# EAGLE board SparkFun_Artemis_OpenLog-Panel (EAGLE 9.6.0), part 1 of 8
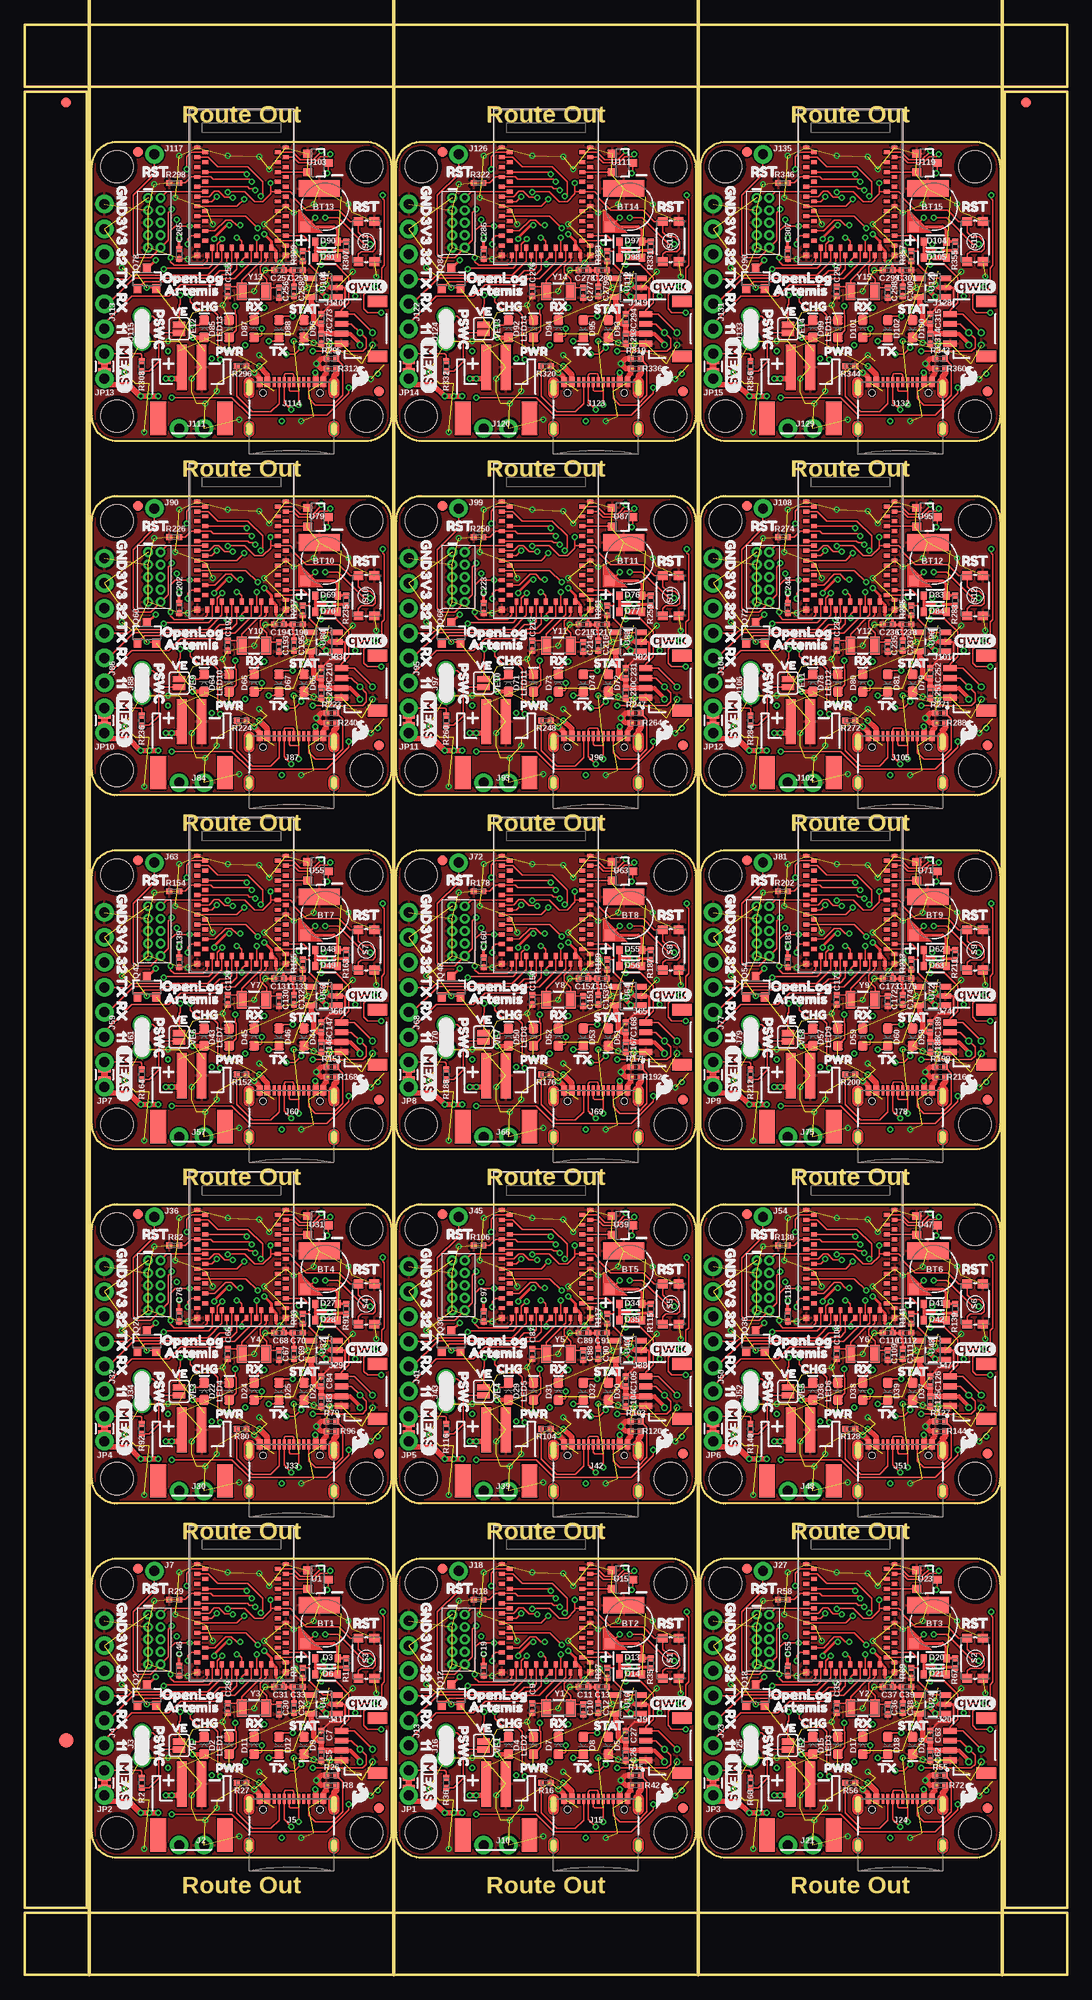
[diagram p0: board, top side]
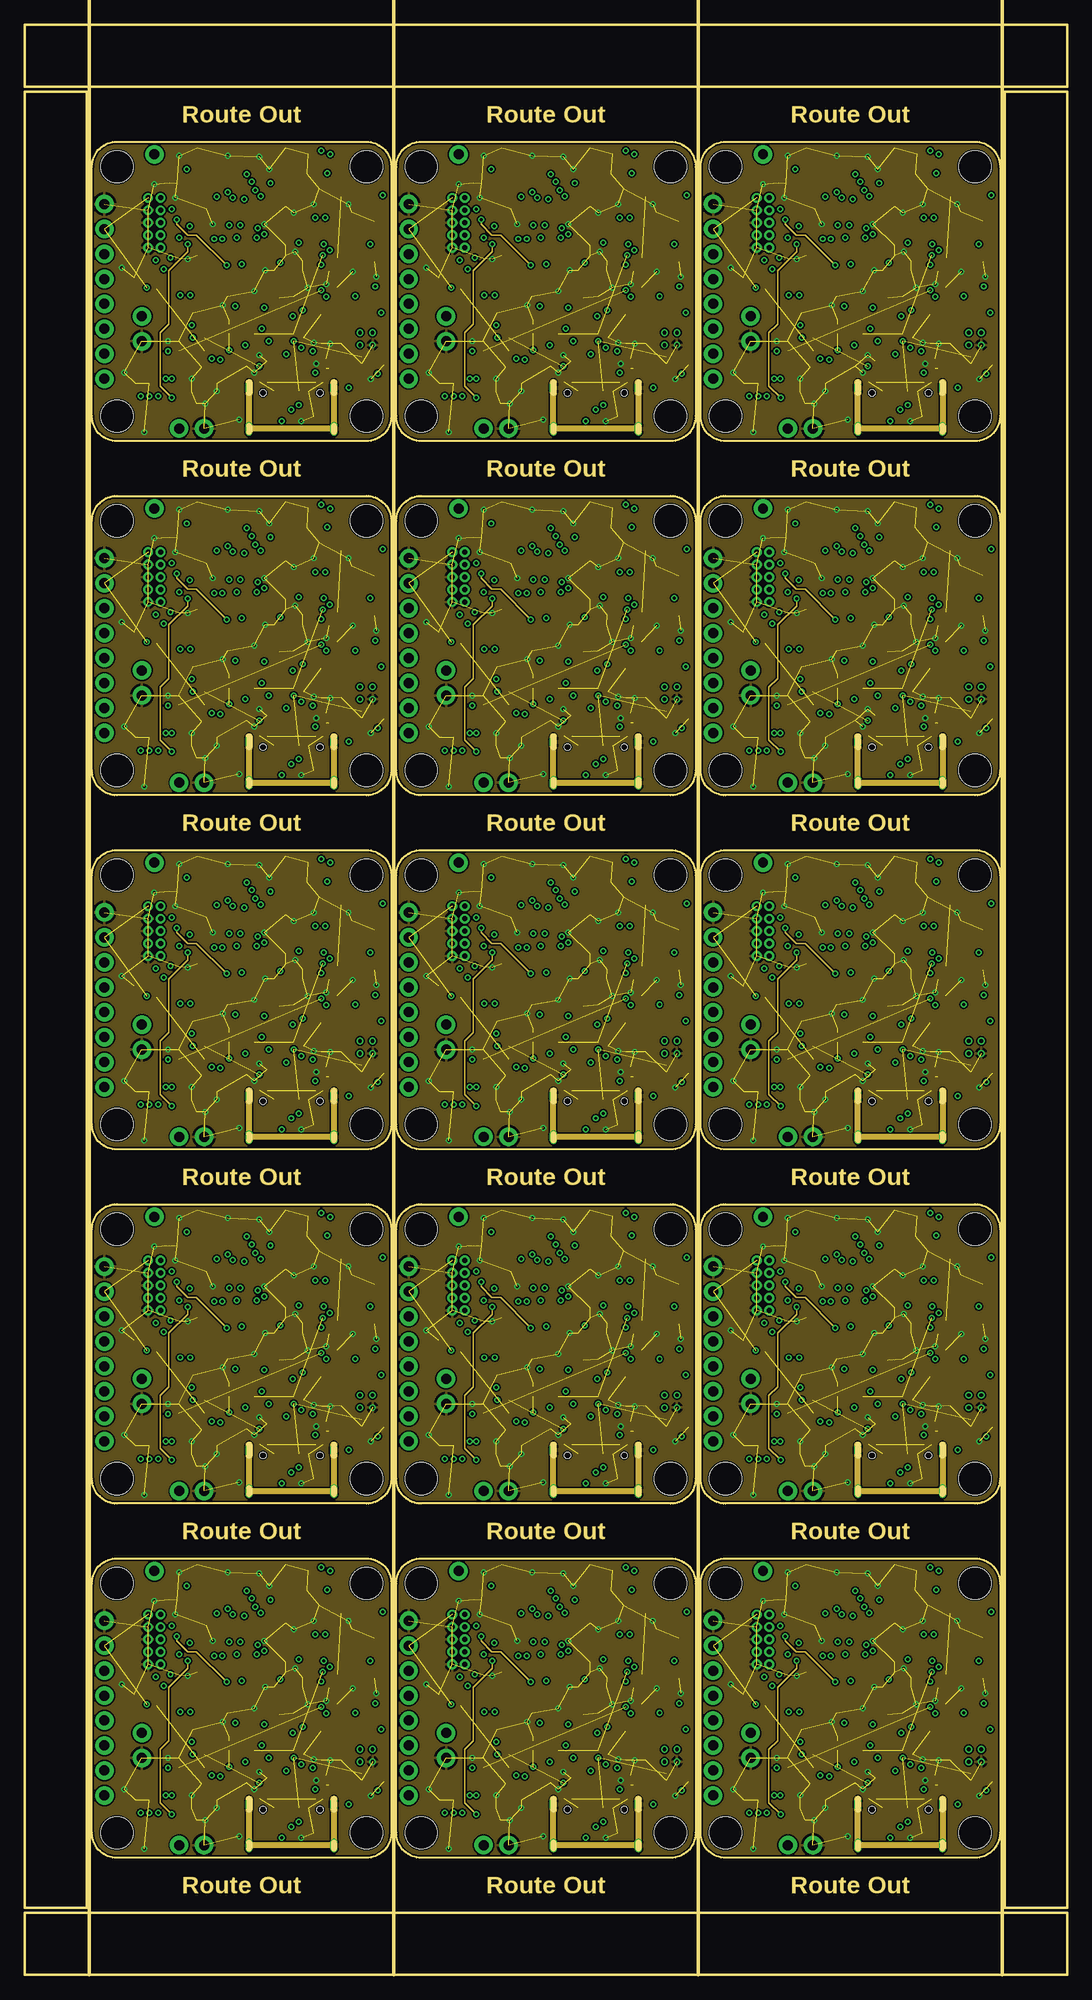
[diagram p1: board, inner layer Route2]
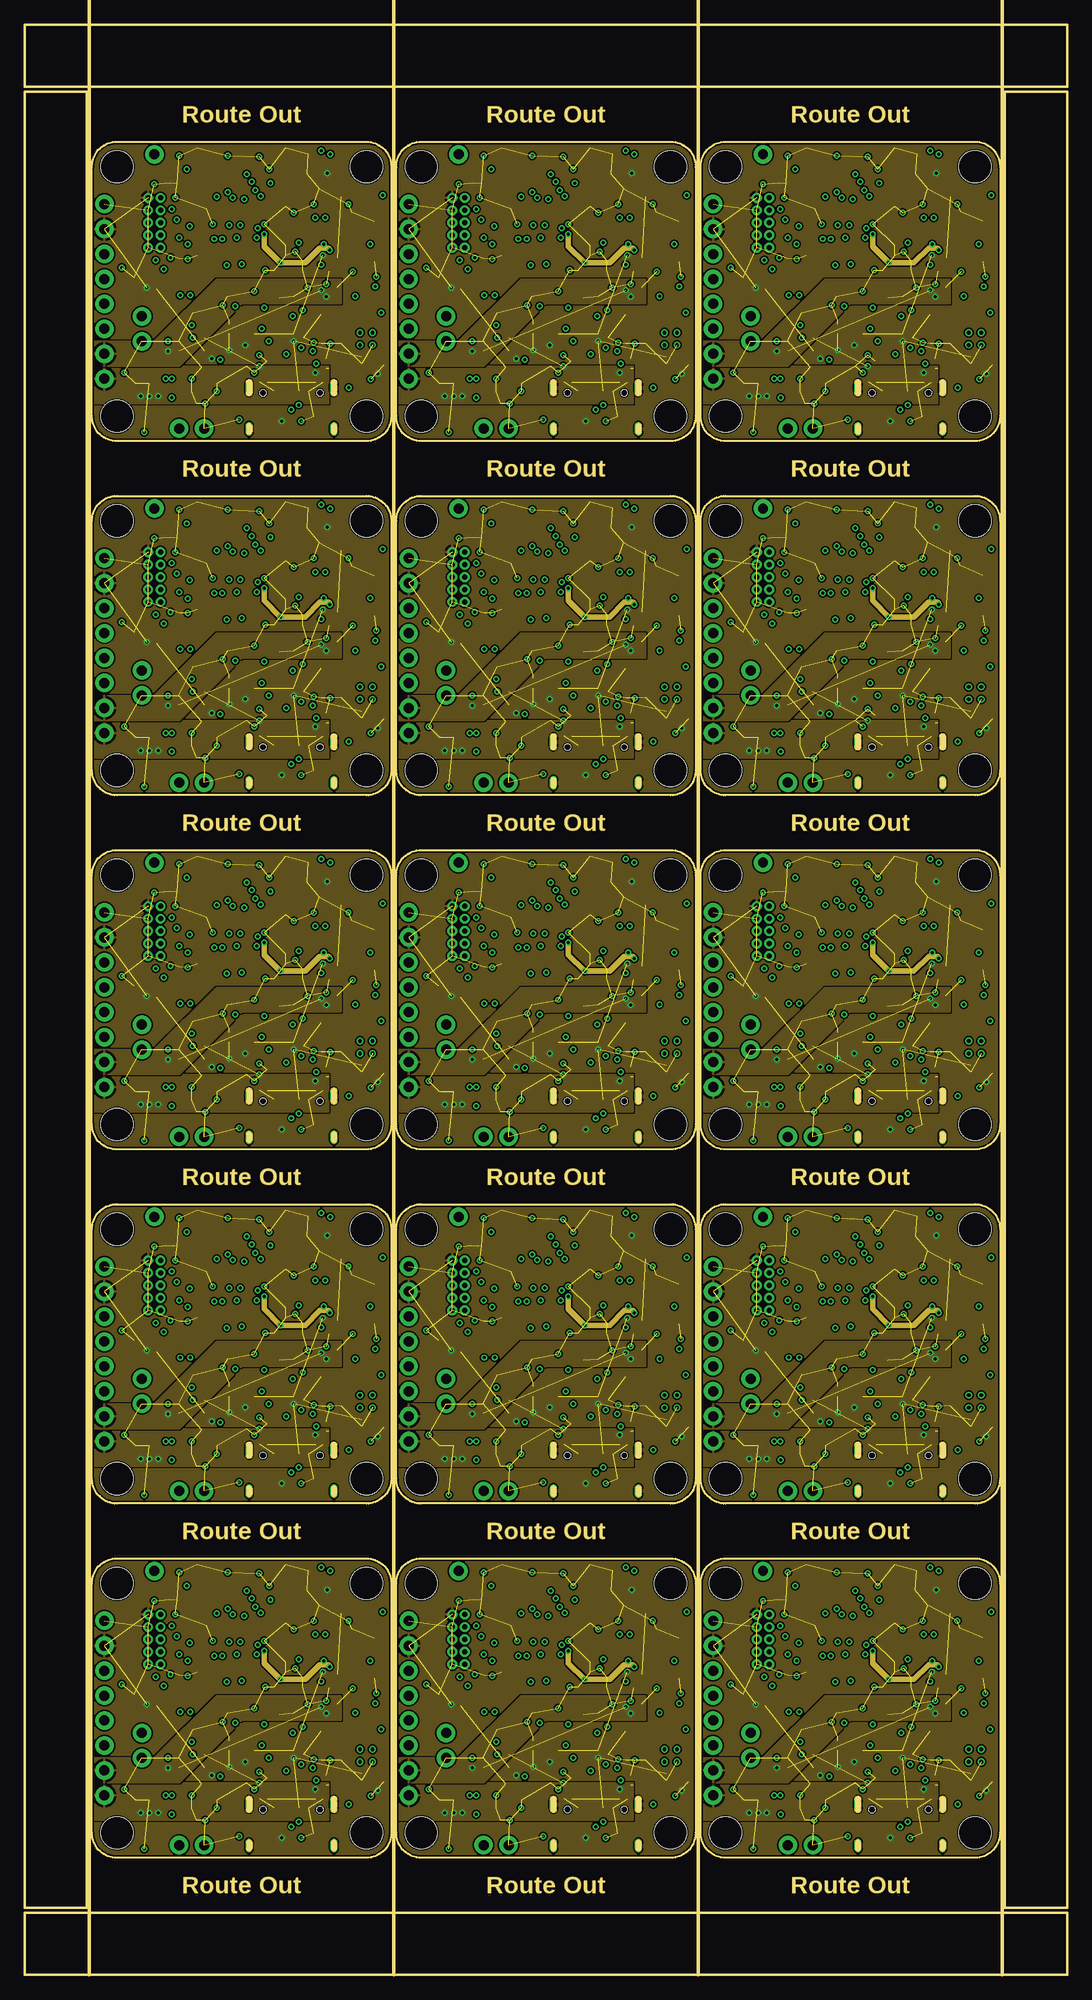
[diagram p2: board, inner layer Route15]
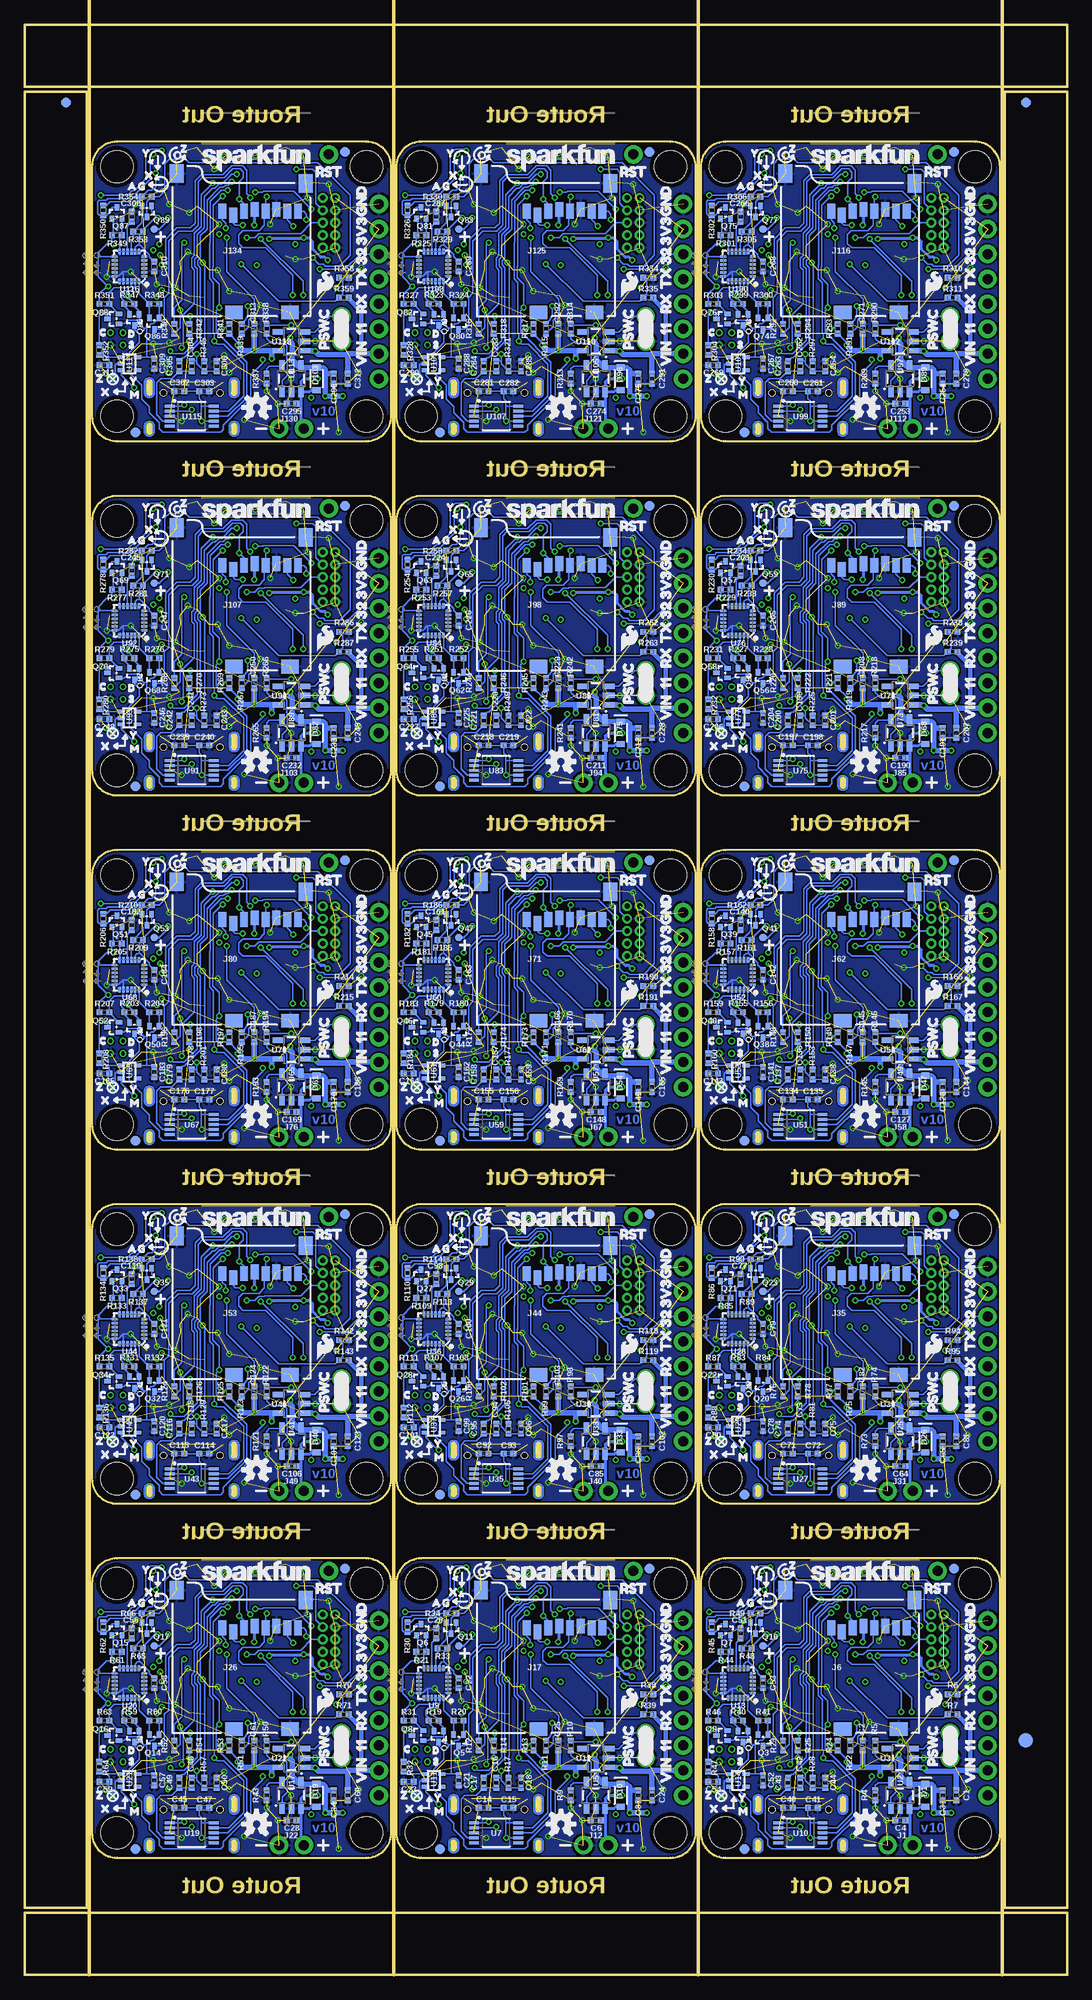
[diagram p3: board, bottom side, seen from below]

Size 106.17 x 198.63 mm. Coordinates in mm from the lower left corner, seen from the top.
Outline: 34.8,11.94 9.4,11.94 arc-90 6.86,14.48 6.86,39.88 arc-90 9.4,42.42 34.8,42.42 arc-90 37.34,39.88 37.34,14.48 arc-90 34.8,11.94
Outline: 65.79,11.94 40.39,11.94 arc-90 37.85,14.48 37.85,39.88 arc-90 40.39,42.42 65.79,42.42 arc-90 68.33,39.88 68.33,14.48 arc-90 65.79,11.94
Outline: 96.77,11.94 71.37,11.94 arc-90 68.83,14.48 68.83,39.88 arc-90 71.37,42.42 96.77,42.42 arc-90 99.31,39.88 99.31,14.48 arc-90 96.77,11.94
Outline: 34.8,48.01 9.4,48.01 arc-90 6.86,50.55 6.86,75.95 arc-90 9.4,78.49 34.8,78.49 arc-90 37.34,75.95 37.34,50.55 arc-90 34.8,48.01
Outline: 65.79,48.01 40.39,48.01 arc-90 37.85,50.55 37.85,75.95 arc-90 40.39,78.49 65.79,78.49 arc-90 68.33,75.95 68.33,50.55 arc-90 65.79,48.01
Outline: 96.77,48.01 71.37,48.01 arc-90 68.83,50.55 68.83,75.95 arc-90 71.37,78.49 96.77,78.49 arc-90 99.31,75.95 99.31,50.55 arc-90 96.77,48.01
Outline: 34.8,84.07 9.4,84.07 arc-90 6.86,86.61 6.86,112.01 arc-90 9.4,114.55 34.8,114.55 arc-90 37.34,112.01 37.34,86.61 arc-90 34.8,84.07
Outline: 65.79,84.07 40.39,84.07 arc-90 37.85,86.61 37.85,112.01 arc-90 40.39,114.55 65.79,114.55 arc-90 68.33,112.01 68.33,86.61 arc-90 65.79,84.07
Outline: 96.77,84.07 71.37,84.07 arc-90 68.83,86.61 68.83,112.01 arc-90 71.37,114.55 96.77,114.55 arc-90 99.31,112.01 99.31,86.61 arc-90 96.77,84.07
Outline: 34.8,120.14 9.4,120.14 arc-90 6.86,122.68 6.86,148.08 arc-90 9.4,150.62 34.8,150.62 arc-90 37.34,148.08 37.34,122.68 arc-90 34.8,120.14
Outline: 65.79,120.14 40.39,120.14 arc-90 37.85,122.68 37.85,148.08 arc-90 40.39,150.62 65.79,150.62 arc-90 68.33,148.08 68.33,122.68 arc-90 65.79,120.14
Outline: 96.77,120.14 71.37,120.14 arc-90 68.83,122.68 68.83,148.08 arc-90 71.37,150.62 96.77,150.62 arc-90 99.31,148.08 99.31,122.68 arc-90 96.77,120.14
Outline: 34.8,156.21 9.4,156.21 arc-90 6.86,158.75 6.86,184.15 arc-90 9.4,186.69 34.8,186.69 arc-90 37.34,184.15 37.34,158.75 arc-90 34.8,156.21
Outline: 65.79,156.21 40.39,156.21 arc-90 37.85,158.75 37.85,184.15 arc-90 40.39,186.69 65.79,186.69 arc-90 68.33,184.15 68.33,158.75 arc-90 65.79,156.21
Outline: 96.77,156.21 71.37,156.21 arc-90 68.83,158.75 68.83,184.15 arc-90 71.37,186.69 96.77,186.69 arc-90 99.31,184.15 99.31,158.75 arc-90 96.77,156.21
Outline: 0,6.35 106.17,6.35 106.17,0 0,0 0,6.35
Outline: 99.82,191.77 106.17,191.77 106.17,6.86 99.82,6.86 99.82,191.77
Outline: 0,198.63 106.17,198.63 106.17,192.28 0,192.28 0,198.63
Outline: 0,191.77 6.35,191.77 6.35,6.86 0,6.86 0,191.77
Copper layers (1+2*15+16): Top 0.035mm / dielectric 1.5mm / Route2 0.035mm / dielectric 0.15mm / Route15 0.035mm / dielectric 0.2mm / Bottom 0.035mm
Design rules "SparkFun_Artemis_OpenLog": minimum track width 6mil, minimum drill 0.3mm, track to track 6mil, track to pad 6mil, pad to pad 6mil, via to via 6mil, smd to smd 6mil, copper to edge 6mil, drill to drill 6mil, minimum pad ring 6mil, minimum via ring 6mil, stop-mask expansion 4mil, vias tented up to drill 25mil, thermal gap 10mil
Net classes: 1 Power: width 0.457 mm
Milling: 4 lines

## Footprints (pad centres in the part's own frame; a part is rotated, then mirrored left to right if it is on the bottom)
ML414H_IV01E = smd 1 x 1: + 2.022,2.032 | smd 4.2 x 1.7: - 0.6,-1.85
0402-TIGHT = smd 0.6 x 0.6: 1 -0.5,0; 2 0.5,0
SOD-323 = smd 0.63 x 0.83: A 1.15,0; C -1.15,0
LED-0603 = smd 1 x 1: A -0.877,0; C 0.877,0
FIDUCIAL-1X2 = smd 1 x 1: 1 0,0
FIDUCIAL-1.5X3 = smd 1.5 x 1.5: 1 0,0
TP_15TH = drill 0.381 pad 0.61: P$1 0,0
STAND-OFF = hole 3.302: 0,0
1X02_NO_SILK = drill 1.016 pad 1.88: 1 0,0; 2 2.54,0
JST-2-SMD = smd 1 x 4.6: 1 -1,-3.7; 2 1,-3.7 | smd 1.6 x 3.4: NC1 -3.4,1.5; NC2 3.4,1.5
1X06_NO_SILK = drill 1.016 pad 1.88: 1 0,0; 2 2.54,0; 3 5.08,0; 4 7.62,0; 5 10.16,0; 6 12.7,0
USB-C-16P_4LAYER-PADS = smd 0.3 x 1: A5 -1.25,-0.34; A6 -0.25,-0.34; A7 0.25,-0.34; A8 1.25,-0.34; B5 1.75,-0.34; B6 0.75,-0.34; B7 -0.75,-0.34; B8 -1.75,-0.34 | smd 0.6 x 1: GND -3.225,-0.34; GND2 3.225,-0.34; VBUS1 -2.45,-0.34; VBUS2 2.45,-0.34 | drill 0.4 pad 0.6 long: SHLD1 -4.318,-0.915; SHLD2 4.318,-0.915; SHLD3 -4.318,-5.095; SHLD4 4.318,-5.095 | hole 0.65: -2.89,-1.445; 2.89,-1.445
MICRO-SD-SOCKET = smd 1.8 x 1.4: CD1 -2.05,0.4; CD2 -7.75,0.4 | smd 0.8 x 1.5: CS/DAT3 -7.84,10.3; DAT1 -1.24,10.7; DAT2 -8.94,10.7; DI/CMD -6.74,10.7; DO/DAT0 -2.34,10.7; GND -3.44,10.9; SCLK -4.54,10.7; VCC -5.64,10.9 | smd 1.4 x 1.9: GND1 -13.6,14.55; GND3 -0.45,13.55
1X01_NO_SILK = drill 1.016 pad 1.88: 1 0,0
2X5-PTH-1.27MM = drill 0.508 pad 1: 1 -2.54,-0.635; 2 -2.54,0.635; 3 -1.27,-0.635; 4 -1.27,0.635; 5 0,-0.635; 6 0,0.635; 7 1.27,-0.635; 8 1.27,0.635; 9 2.54,-0.635; 10 2.54,0.635
JST04_1MM_RA = smd 0.6 x 1.35: 1 -1.5,0; 2 -0.5,0; 3 0.5,0; 4 1.5,0 | smd 1.2 x 2: NC1 2.8,-3.675; NC2 -2.8,-3.675
COMBO-JUMPER_2_NC_TRACE = smd 0.635 x 1.27: 1 -0.508,0; 2 0.508,0 | drill 1.016 pad 1.88: 3 -1.27,0; 4 1.27,0
SOT-416FL = smd 0.46 x 0.65: 1 -0.5,-1.1; 2 0.5,-1.1; 3 0,0.05
SOT23-3 = smd 0.8 x 0.9: 1 -0.95,-1; 2 0.95,-1; 3 0,1.1
TACTILE_SWITCH_SMD_4.6X2.8MM = smd 0.9 x 1: 1 -2.05,-0.8; 2 2.05,-0.8; 3 2.05,0.8; 4 -2.05,0.8
PAD.03X.03 = smd 0.762 x 0.762: P$1 0,0
SOT23-5 = smd 0.55 x 1.2: 1 -0.95,-1.3; 2 0,-1.3; 3 0.95,-1.3; 4 0.95,1.3; 5 -0.95,1.3
ARTEMIS_FP = smd 0.4 x 0.6: AD16 -4,-3.7; BOOT 1.5,4.5; D0 0.5,-4.5; D1 -0.5,-4.5; D2 -1,-3.7; D3 2,-3.7; D7 -1.5,4.5; D8 -0.5,4.5; D9 2,3.7; D10 1,3.7; D14 -5,3.7; D17 -3.5,-4.5; D36 2.5,-4.5; D38 3,-3.7; D40 2.5,4.5; D41 -2.5,-4.5; GND@1 4.5,4.5; GND@39 -5.5,-4.5; GND@47 -1.5,-4.5; GND@59 4.5,-4.5; RXI-0 3.5,4.5; SWDCK 4,3.7; SWDIO 0,3.7; TXO-0 0.5,4.5; ~AD31 -3,-3.7; ~AD35 -2,3.7; ~D4 -2.5,4.5; ~D5 -1,3.7; ~D18 -4.5,-4.5; ~D19 -5,-3.7; ~D22 -3.5,4.5; ~D23 -4,3.7; ~D24 -3,3.7; ~D27 -4.5,4.5; ~D28 -5.5,4.5; ~D37 3.5,-4.5; ~D39 3,3.7; ~D42 1.5,-4.5; ~D43 1,-3.7; ~D44 4,-3.7; ~D45 -2,-3.7; ~RST 0,-3.7 | smd 0.6 x 0.4: AD34 -6.5,-0.5; D15 -6.5,0.5; VDD@36 -5.7,-3; VDD@37 -6.5,-3.5; XI -6.5,-2.5; XO -5.7,-2; ~AD11 -5.7,-1; ~AD12 -5.7,2; ~AD13 -5.7,1; ~AD29 -6.5,-1.5; ~AD32 -5.7,3; ~AD33/SWO -5.7,0; ~D6 -6.5,3.5; ~D25 -6.5,2.5; ~D26 -6.5,1.5 | smd 0.6 x 0.6: GND@22 -6.5,4.5; GND@38 -6.5,-4.5
MSOP10 = smd 1 x 0.3: 1 -2.25,1; 2 -2.25,0.5; 3 -2.25,0; 4 -2.25,-0.5; 5 -2.25,-1; 6 2.25,-1; 7 2.25,-0.5; 8 2.25,0; 9 2.25,0.5; 10 2.25,1
QFN24-3X3-ICM-20948 = smd 0.495 x 0.25: 1 -1.552,1; 6 -1.552,-1; 13 1.552,-1; 18 1.552,1 | smd 0.6 x 0.25: 2 -1.5,0.6; 3 -1.5,0.2; 4 -1.5,-0.2; 5 -1.5,-0.6; 14 1.5,-0.6; 15 1.5,-0.2; 16 1.5,0.2; 17 1.5,0.6 | smd 0.25 x 0.495: 7 -1,-1.552; 12 1,-1.552; 19 1,1.552; 24 -1,1.552 | smd 0.25 x 0.6: 8 -0.6,-1.5; 9 -0.2,-1.5; 10 0.2,-1.5; 11 0.6,-1.5; 20 0.6,1.5; 21 0.2,1.5; 22 -0.2,1.5; 23 -0.6,1.5
SC70 = smd 0.4 x 0.75: 1 -0.65,-0.825; 2 0,-0.825; 3 0.65,-0.825; 4 0.65,0.825; 5 -0.65,0.825
SMT-JUMPER_2_NO_SILK = smd 0.635 x 1.27: 1 -0.406,0; 2 0.406,0
CRYSTAL-SMD-3.2X1.5MM = smd 1 x 1.8: P$1 -1.25,0; P$2 1.25,0

## Placement (x,y rotation side)
BT1  ML414H  [ML414H_IV01E]  30.61,35.81 180 top
BT2  ML414H  [ML414H_IV01E]  61.59,35.81 180 top
BT3  ML414H  [ML414H_IV01E]  92.58,35.81 180 top
BT4  ML414H  [ML414H_IV01E]  30.61,71.88 180 top
BT5  ML414H  [ML414H_IV01E]  61.59,71.88 180 top
BT6  ML414H  [ML414H_IV01E]  92.58,71.88 180 top
BT7  ML414H  [ML414H_IV01E]  30.61,107.95 180 top
BT8  ML414H  [ML414H_IV01E]  61.59,107.95 180 top
BT9  ML414H  [ML414H_IV01E]  92.58,107.95 180 top
BT10  ML414H  [ML414H_IV01E]  30.61,144.02 180 top
BT11  ML414H  [ML414H_IV01E]  61.59,144.02 180 top
BT12  ML414H  [ML414H_IV01E]  92.58,144.02 180 top
BT13  ML414H  [ML414H_IV01E]  30.61,180.09 180 top
BT14  ML414H  [ML414H_IV01E]  61.59,180.09 180 top
BT15  ML414H  [ML414H_IV01E]  92.58,180.09 180 top
C1  1.0uF  [0402-TIGHT]  11.3,18.29 270 bottom
C2  2.2uF  [0402-TIGHT]  20.83,23.37 90 bottom
C3  4.7uF  [0402-TIGHT]  12.7,18.29 270 bottom
C4  4.7uF  [0402-TIGHT]  17.02,15.75 180 bottom
C5  0.1uF  [0402-TIGHT]  30.23,22.35 270 top
C6  4.7uF  [0402-TIGHT]  48.01,15.75 180 bottom
C7  2.2uF  [0402-TIGHT]  30.23,24.38 90 top
C8  4.7uF  [0402-TIGHT]  43.69,18.29 270 bottom
C9  15pF  [0402-TIGHT]  51.69,27.18 90 top
C10  15pF  [0402-TIGHT]  56.9,27.05 90 top
C11  0.1uF  [0402-TIGHT]  56.9,29.34 0 top
C12  10uF  [0402-TIGHT]  58.42,27.18 270 top
C13  1.0uF  [0402-TIGHT]  58.8,29.34 0 top
C14  10nF  [0402-TIGHT]  59.44,17.02 180 bottom
C15  0.1uF  [0402-TIGHT]  56.9,17.02 0 bottom
C16  0.1uF  [0402-TIGHT]  58.17,19.56 90 bottom
C17  0.1uF  [0402-TIGHT]  59.44,19.56 90 bottom
C18  1.0nF  [0402-TIGHT]  55.63,19.56 90 bottom
C19  0.1uF  [0402-TIGHT]  46.74,30.99 270 top
C20  0.1uF  [0402-TIGHT]  64.26,34.8 90 bottom
C21  0.1uF  [0402-TIGHT]  61.98,19.81 270 bottom
C22  1.0uF  [0402-TIGHT]  61.98,29.72 270 bottom
C23  1.0uF  [0402-TIGHT]  67.06,19.69 180 bottom
C24  1.0uF  [0402-TIGHT]  42.29,18.29 270 bottom
C25  2.2uF  [0402-TIGHT]  51.82,23.37 90 bottom
C26  0.1uF  [0402-TIGHT]  61.21,22.35 270 top
C27  2.2uF  [0402-TIGHT]  61.21,24.38 90 top
C28  4.7uF  [0402-TIGHT]  78.99,15.75 180 bottom
C29  15pF  [0402-TIGHT]  20.7,27.18 90 top
C30  15pF  [0402-TIGHT]  25.91,27.05 90 top
C31  0.1uF  [0402-TIGHT]  25.91,29.34 0 top
C32  10uF  [0402-TIGHT]  27.43,27.18 270 top
C33  1.0uF  [0402-TIGHT]  27.81,29.34 0 top
C34  4.7uF  [0402-TIGHT]  74.68,18.29 270 bottom
C35  15pF  [0402-TIGHT]  82.68,27.18 90 top
C36  15pF  [0402-TIGHT]  87.88,27.05 90 top
C37  0.1uF  [0402-TIGHT]  87.88,29.34 0 top
C38  10uF  [0402-TIGHT]  89.41,27.18 270 top
C39  1.0uF  [0402-TIGHT]  89.79,29.34 0 top
C40  10nF  [0402-TIGHT]  28.45,17.02 180 bottom
C41  0.1uF  [0402-TIGHT]  25.91,17.02 0 bottom
C42  0.1uF  [0402-TIGHT]  27.18,19.56 90 bottom
C43  0.1uF  [0402-TIGHT]  28.45,19.56 90 bottom
C44  1.0nF  [0402-TIGHT]  24.64,19.56 90 bottom
C45  10nF  [0402-TIGHT]  90.42,17.02 180 bottom
C46  0.1uF  [0402-TIGHT]  15.75,30.99 270 top
C47  0.1uF  [0402-TIGHT]  87.88,17.02 0 bottom
C48  0.1uF  [0402-TIGHT]  89.15,19.56 90 bottom
C49  0.1uF  [0402-TIGHT]  90.42,19.56 90 bottom
C50  1.0nF  [0402-TIGHT]  86.61,19.56 90 bottom
C51  0.1uF  [0402-TIGHT]  33.27,34.8 90 bottom
C52  0.1uF  [0402-TIGHT]  30.99,19.81 270 bottom
C53  1.0uF  [0402-TIGHT]  30.99,29.72 270 bottom
C54  1.0uF  [0402-TIGHT]  36.07,19.69 180 bottom
C55  0.1uF  [0402-TIGHT]  77.72,30.99 270 top
C56  0.1uF  [0402-TIGHT]  95.25,34.8 90 bottom
C57  0.1uF  [0402-TIGHT]  92.96,19.81 270 bottom
C58  1.0uF  [0402-TIGHT]  92.96,29.72 270 bottom
C59  1.0uF  [0402-TIGHT]  98.04,19.69 180 bottom
C60  1.0uF  [0402-TIGHT]  73.28,18.29 270 bottom
C61  2.2uF  [0402-TIGHT]  82.8,23.37 90 bottom
C62  0.1uF  [0402-TIGHT]  92.2,22.35 270 top
C63  2.2uF  [0402-TIGHT]  92.2,24.38 90 top
C64  4.7uF  [0402-TIGHT]  17.02,51.82 180 bottom
C65  4.7uF  [0402-TIGHT]  12.7,54.36 270 bottom
C66  15pF  [0402-TIGHT]  20.7,63.25 90 top
C67  15pF  [0402-TIGHT]  25.91,63.12 90 top
C68  0.1uF  [0402-TIGHT]  25.91,65.41 0 top
C69  10uF  [0402-TIGHT]  27.43,63.25 270 top
C70  1.0uF  [0402-TIGHT]  27.81,65.41 0 top
C71  10nF  [0402-TIGHT]  28.45,53.09 180 bottom
C72  0.1uF  [0402-TIGHT]  25.91,53.09 0 bottom
C73  0.1uF  [0402-TIGHT]  27.18,55.63 90 bottom
C74  0.1uF  [0402-TIGHT]  28.45,55.63 90 bottom
C75  1.0nF  [0402-TIGHT]  24.64,55.63 90 bottom
C76  0.1uF  [0402-TIGHT]  15.75,67.06 270 top
C77  0.1uF  [0402-TIGHT]  33.27,70.87 90 bottom
C78  0.1uF  [0402-TIGHT]  30.99,55.88 270 bottom
C79  1.0uF  [0402-TIGHT]  30.99,65.79 270 bottom
C80  1.0uF  [0402-TIGHT]  36.07,55.75 180 bottom
C81  1.0uF  [0402-TIGHT]  11.3,54.36 270 bottom
C82  2.2uF  [0402-TIGHT]  20.83,59.44 90 bottom
C83  0.1uF  [0402-TIGHT]  30.23,58.42 270 top
C84  2.2uF  [0402-TIGHT]  30.23,60.45 90 top
C85  4.7uF  [0402-TIGHT]  48.01,51.82 180 bottom
C86  4.7uF  [0402-TIGHT]  43.69,54.36 270 bottom
C87  15pF  [0402-TIGHT]  51.69,63.25 90 top
C88  15pF  [0402-TIGHT]  56.9,63.12 90 top
C89  0.1uF  [0402-TIGHT]  56.9,65.41 0 top
C90  10uF  [0402-TIGHT]  58.42,63.25 270 top
C91  1.0uF  [0402-TIGHT]  58.8,65.41 0 top
C92  10nF  [0402-TIGHT]  59.44,53.09 180 bottom
C93  0.1uF  [0402-TIGHT]  56.9,53.09 0 bottom
C94  0.1uF  [0402-TIGHT]  58.17,55.63 90 bottom
C95  0.1uF  [0402-TIGHT]  59.44,55.63 90 bottom
C96  1.0nF  [0402-TIGHT]  55.63,55.63 90 bottom
C97  0.1uF  [0402-TIGHT]  46.74,67.06 270 top
C98  0.1uF  [0402-TIGHT]  64.26,70.87 90 bottom
C99  0.1uF  [0402-TIGHT]  61.98,55.88 270 bottom
C100  1.0uF  [0402-TIGHT]  61.98,65.79 270 bottom
C101  1.0uF  [0402-TIGHT]  67.06,55.75 180 bottom
C102  1.0uF  [0402-TIGHT]  42.29,54.36 270 bottom
C103  2.2uF  [0402-TIGHT]  51.82,59.44 90 bottom
C104  0.1uF  [0402-TIGHT]  61.21,58.42 270 top
C105  2.2uF  [0402-TIGHT]  61.21,60.45 90 top
C106  4.7uF  [0402-TIGHT]  78.99,51.82 180 bottom
C107  4.7uF  [0402-TIGHT]  74.68,54.36 270 bottom
C108  15pF  [0402-TIGHT]  82.68,63.25 90 top
C109  15pF  [0402-TIGHT]  87.88,63.12 90 top
C110  0.1uF  [0402-TIGHT]  87.88,65.41 0 top
C111  10uF  [0402-TIGHT]  89.41,63.25 270 top
C112  1.0uF  [0402-TIGHT]  89.79,65.41 0 top
C113  10nF  [0402-TIGHT]  90.42,53.09 180 bottom
C114  0.1uF  [0402-TIGHT]  87.88,53.09 0 bottom
C115  0.1uF  [0402-TIGHT]  89.15,55.63 90 bottom
C116  0.1uF  [0402-TIGHT]  90.42,55.63 90 bottom
C117  1.0nF  [0402-TIGHT]  86.61,55.63 90 bottom
C118  0.1uF  [0402-TIGHT]  77.72,67.06 270 top
C119  0.1uF  [0402-TIGHT]  95.25,70.87 90 bottom
C120  0.1uF  [0402-TIGHT]  92.96,55.88 270 bottom
C121  1.0uF  [0402-TIGHT]  92.96,65.79 270 bottom
C122  1.0uF  [0402-TIGHT]  98.04,55.75 180 bottom
C123  1.0uF  [0402-TIGHT]  73.28,54.36 270 bottom
C124  2.2uF  [0402-TIGHT]  82.8,59.44 90 bottom
C125  0.1uF  [0402-TIGHT]  92.2,58.42 270 top
C126  2.2uF  [0402-TIGHT]  92.2,60.45 90 top
C127  4.7uF  [0402-TIGHT]  17.02,87.88 180 bottom
C128  4.7uF  [0402-TIGHT]  12.7,90.42 270 bottom
C129  15pF  [0402-TIGHT]  20.7,99.31 90 top
C130  15pF  [0402-TIGHT]  25.91,99.19 90 top
C131  0.1uF  [0402-TIGHT]  25.91,101.47 0 top
C132  10uF  [0402-TIGHT]  27.43,99.31 270 top
C133  1.0uF  [0402-TIGHT]  27.81,101.47 0 top
C134  10nF  [0402-TIGHT]  28.45,89.15 180 bottom
C135  0.1uF  [0402-TIGHT]  25.91,89.15 0 bottom
C136  0.1uF  [0402-TIGHT]  27.18,91.69 90 bottom
C137  0.1uF  [0402-TIGHT]  28.45,91.69 90 bottom
C138  1.0nF  [0402-TIGHT]  24.64,91.69 90 bottom
C139  0.1uF  [0402-TIGHT]  15.75,103.12 270 top
C140  0.1uF  [0402-TIGHT]  33.27,106.93 90 bottom
C141  0.1uF  [0402-TIGHT]  30.99,91.95 270 bottom
C142  1.0uF  [0402-TIGHT]  30.99,101.85 270 bottom
C143  1.0uF  [0402-TIGHT]  36.07,91.82 180 bottom
C144  1.0uF  [0402-TIGHT]  11.3,90.42 270 bottom
C145  2.2uF  [0402-TIGHT]  20.83,95.5 90 bottom
C146  0.1uF  [0402-TIGHT]  30.23,94.49 270 top
C147  2.2uF  [0402-TIGHT]  30.23,96.52 90 top
C148  4.7uF  [0402-TIGHT]  48.01,87.88 180 bottom
C149  4.7uF  [0402-TIGHT]  43.69,90.42 270 bottom
C150  15pF  [0402-TIGHT]  51.69,99.31 90 top
C151  15pF  [0402-TIGHT]  56.9,99.19 90 top
C152  0.1uF  [0402-TIGHT]  56.9,101.47 0 top
C153  10uF  [0402-TIGHT]  58.42,99.31 270 top
C154  1.0uF  [0402-TIGHT]  58.8,101.47 0 top
C155  10nF  [0402-TIGHT]  59.44,89.15 180 bottom
C156  0.1uF  [0402-TIGHT]  56.9,89.15 0 bottom
C157  0.1uF  [0402-TIGHT]  58.17,91.69 90 bottom
C158  0.1uF  [0402-TIGHT]  59.44,91.69 90 bottom
C159  1.0nF  [0402-TIGHT]  55.63,91.69 90 bottom
C160  0.1uF  [0402-TIGHT]  46.74,103.12 270 top
C161  0.1uF  [0402-TIGHT]  64.26,106.93 90 bottom
C162  0.1uF  [0402-TIGHT]  61.98,91.95 270 bottom
C163  1.0uF  [0402-TIGHT]  61.98,101.85 270 bottom
C164  1.0uF  [0402-TIGHT]  67.06,91.82 180 bottom
C165  1.0uF  [0402-TIGHT]  42.29,90.42 270 bottom
C166  2.2uF  [0402-TIGHT]  51.82,95.5 90 bottom
C167  0.1uF  [0402-TIGHT]  61.21,94.49 270 top
C168  2.2uF  [0402-TIGHT]  61.21,96.52 90 top
C169  4.7uF  [0402-TIGHT]  78.99,87.88 180 bottom
C170  4.7uF  [0402-TIGHT]  74.68,90.42 270 bottom
C171  15pF  [0402-TIGHT]  82.68,99.31 90 top
C172  15pF  [0402-TIGHT]  87.88,99.19 90 top
C173  0.1uF  [0402-TIGHT]  87.88,101.47 0 top
C174  10uF  [0402-TIGHT]  89.41,99.31 270 top
C175  1.0uF  [0402-TIGHT]  89.79,101.47 0 top
C176  10nF  [0402-TIGHT]  90.42,89.15 180 bottom
C177  0.1uF  [0402-TIGHT]  87.88,89.15 0 bottom
C178  0.1uF  [0402-TIGHT]  89.15,91.69 90 bottom
C179  0.1uF  [0402-TIGHT]  90.42,91.69 90 bottom
C180  1.0nF  [0402-TIGHT]  86.61,91.69 90 bottom
C181  0.1uF  [0402-TIGHT]  77.72,103.12 270 top
C182  0.1uF  [0402-TIGHT]  95.25,106.93 90 bottom
C183  0.1uF  [0402-TIGHT]  92.96,91.95 270 bottom
C184  1.0uF  [0402-TIGHT]  92.96,101.85 270 bottom
C185  1.0uF  [0402-TIGHT]  98.04,91.82 180 bottom
C186  1.0uF  [0402-TIGHT]  73.28,90.42 270 bottom
C187  2.2uF  [0402-TIGHT]  82.8,95.5 90 bottom
C188  0.1uF  [0402-TIGHT]  92.2,94.49 270 top
C189  2.2uF  [0402-TIGHT]  92.2,96.52 90 top
C190  4.7uF  [0402-TIGHT]  17.02,123.95 180 bottom
C191  4.7uF  [0402-TIGHT]  12.7,126.49 270 bottom
C192  15pF  [0402-TIGHT]  20.7,135.38 90 top
C193  15pF  [0402-TIGHT]  25.91,135.25 90 top
C194  0.1uF  [0402-TIGHT]  25.91,137.54 0 top
C195  10uF  [0402-TIGHT]  27.43,135.38 270 top
C196  1.0uF  [0402-TIGHT]  27.81,137.54 0 top
C197  10nF  [0402-TIGHT]  28.45,125.22 180 bottom
C198  0.1uF  [0402-TIGHT]  25.91,125.22 0 bottom
C199  0.1uF  [0402-TIGHT]  27.18,127.76 90 bottom
C200  0.1uF  [0402-TIGHT]  28.45,127.76 90 bottom
C201  1.0nF  [0402-TIGHT]  24.64,127.76 90 bottom
C202  0.1uF  [0402-TIGHT]  15.75,139.19 270 top
C203  0.1uF  [0402-TIGHT]  33.27,143 90 bottom
C204  0.1uF  [0402-TIGHT]  30.99,128.02 270 bottom
C205  1.0uF  [0402-TIGHT]  30.99,137.92 270 bottom
C206  1.0uF  [0402-TIGHT]  36.07,127.89 180 bottom
C207  1.0uF  [0402-TIGHT]  11.3,126.49 270 bottom
C208  2.2uF  [0402-TIGHT]  20.83,131.57 90 bottom
C209  0.1uF  [0402-TIGHT]  30.23,130.56 270 top
C210  2.2uF  [0402-TIGHT]  30.23,132.59 90 top
C211  4.7uF  [0402-TIGHT]  48.01,123.95 180 bottom
C212  4.7uF  [0402-TIGHT]  43.69,126.49 270 bottom
C213  15pF  [0402-TIGHT]  51.69,135.38 90 top
C214  15pF  [0402-TIGHT]  56.9,135.25 90 top
C215  0.1uF  [0402-TIGHT]  56.9,137.54 0 top
C216  10uF  [0402-TIGHT]  58.42,135.38 270 top
C217  1.0uF  [0402-TIGHT]  58.8,137.54 0 top
C218  10nF  [0402-TIGHT]  59.44,125.22 180 bottom
C219  0.1uF  [0402-TIGHT]  56.9,125.22 0 bottom
C220  0.1uF  [0402-TIGHT]  58.17,127.76 90 bottom
C221  0.1uF  [0402-TIGHT]  59.44,127.76 90 bottom
C222  1.0nF  [0402-TIGHT]  55.63,127.76 90 bottom
C223  0.1uF  [0402-TIGHT]  46.74,139.19 270 top
C224  0.1uF  [0402-TIGHT]  64.26,143 90 bottom
C225  0.1uF  [0402-TIGHT]  61.98,128.02 270 bottom
C226  1.0uF  [0402-TIGHT]  61.98,137.92 270 bottom
C227  1.0uF  [0402-TIGHT]  67.06,127.89 180 bottom
C228  1.0uF  [0402-TIGHT]  42.29,126.49 270 bottom
C229  2.2uF  [0402-TIGHT]  51.82,131.57 90 bottom
C230  0.1uF  [0402-TIGHT]  61.21,130.56 270 top
C231  2.2uF  [0402-TIGHT]  61.21,132.59 90 top
C232  4.7uF  [0402-TIGHT]  78.99,123.95 180 bottom
C233  4.7uF  [0402-TIGHT]  74.68,126.49 270 bottom
C234  15pF  [0402-TIGHT]  82.68,135.38 90 top
C235  15pF  [0402-TIGHT]  87.88,135.25 90 top
C236  0.1uF  [0402-TIGHT]  87.88,137.54 0 top
C237  10uF  [0402-TIGHT]  89.41,135.38 270 top
C238  1.0uF  [0402-TIGHT]  89.79,137.54 0 top
C239  10nF  [0402-TIGHT]  90.42,125.22 180 bottom
C240  0.1uF  [0402-TIGHT]  87.88,125.22 0 bottom
C241  0.1uF  [0402-TIGHT]  89.15,127.76 90 bottom
C242  0.1uF  [0402-TIGHT]  90.42,127.76 90 bottom
C243  1.0nF  [0402-TIGHT]  86.61,127.76 90 bottom
C244  0.1uF  [0402-TIGHT]  77.72,139.19 270 top
C245  0.1uF  [0402-TIGHT]  95.25,143 90 bottom
C246  0.1uF  [0402-TIGHT]  92.96,128.02 270 bottom
C247  1.0uF  [0402-TIGHT]  92.96,137.92 270 bottom
C248  1.0uF  [0402-TIGHT]  98.04,127.89 180 bottom
C249  1.0uF  [0402-TIGHT]  73.28,126.49 270 bottom
C250  2.2uF  [0402-TIGHT]  82.8,131.57 90 bottom
C251  0.1uF  [0402-TIGHT]  92.2,130.56 270 top
C252  2.2uF  [0402-TIGHT]  92.2,132.59 90 top
C253  4.7uF  [0402-TIGHT]  17.02,160.02 180 bottom
C254  4.7uF  [0402-TIGHT]  12.7,162.56 270 bottom
C255  15pF  [0402-TIGHT]  20.7,171.45 90 top
C256  15pF  [0402-TIGHT]  25.91,171.32 90 top
C257  0.1uF  [0402-TIGHT]  25.91,173.61 0 top
C258  10uF  [0402-TIGHT]  27.43,171.45 270 top
C259  1.0uF  [0402-TIGHT]  27.81,173.61 0 top
C260  10nF  [0402-TIGHT]  28.45,161.29 180 bottom
C261  0.1uF  [0402-TIGHT]  25.91,161.29 0 bottom
C262  0.1uF  [0402-TIGHT]  27.18,163.83 90 bottom
C263  0.1uF  [0402-TIGHT]  28.45,163.83 90 bottom
C264  1.0nF  [0402-TIGHT]  24.64,163.83 90 bottom
C265  0.1uF  [0402-TIGHT]  15.75,175.26 270 top
C266  0.1uF  [0402-TIGHT]  33.27,179.07 90 bottom
C267  0.1uF  [0402-TIGHT]  30.99,164.08 270 bottom
C268  1.0uF  [0402-TIGHT]  30.99,173.99 270 bottom
C269  1.0uF  [0402-TIGHT]  36.07,163.96 180 bottom
C270  1.0uF  [0402-TIGHT]  11.3,162.56 270 bottom
C271  2.2uF  [0402-TIGHT]  20.83,167.64 90 bottom
C272  0.1uF  [0402-TIGHT]  30.23,166.62 270 top
C273  2.2uF  [0402-TIGHT]  30.23,168.66 90 top
C274  4.7uF  [0402-TIGHT]  48.01,160.02 180 bottom
C275  4.7uF  [0402-TIGHT]  43.69,162.56 270 bottom
C276  15pF  [0402-TIGHT]  51.69,171.45 90 top
C277  15pF  [0402-TIGHT]  56.9,171.32 90 top
C278  0.1uF  [0402-TIGHT]  56.9,173.61 0 top
C279  10uF  [0402-TIGHT]  58.42,171.45 270 top
C280  1.0uF  [0402-TIGHT]  58.8,173.61 0 top
C281  10nF  [0402-TIGHT]  59.44,161.29 180 bottom
C282  0.1uF  [0402-TIGHT]  56.9,161.29 0 bottom
C283  0.1uF  [0402-TIGHT]  58.17,163.83 90 bottom
C284  0.1uF  [0402-TIGHT]  59.44,163.83 90 bottom
C285  1.0nF  [0402-TIGHT]  55.63,163.83 90 bottom
C286  0.1uF  [0402-TIGHT]  46.74,175.26 270 top
C287  0.1uF  [0402-TIGHT]  64.26,179.07 90 bottom
C288  0.1uF  [0402-TIGHT]  61.98,164.08 270 bottom
C289  1.0uF  [0402-TIGHT]  61.98,173.99 270 bottom
C290  1.0uF  [0402-TIGHT]  67.06,163.96 180 bottom
C291  1.0uF  [0402-TIGHT]  42.29,162.56 270 bottom
C292  2.2uF  [0402-TIGHT]  51.82,167.64 90 bottom
C293  0.1uF  [0402-TIGHT]  61.21,166.62 270 top
C294  2.2uF  [0402-TIGHT]  61.21,168.66 90 top
C295  4.7uF  [0402-TIGHT]  78.99,160.02 180 bottom
C296  4.7uF  [0402-TIGHT]  74.68,162.56 270 bottom
C297  15pF  [0402-TIGHT]  82.68,171.45 90 top
C298  15pF  [0402-TIGHT]  87.88,171.32 90 top
C299  0.1uF  [0402-TIGHT]  87.88,173.61 0 top
C300  10uF  [0402-TIGHT]  89.41,171.45 270 top
C301  1.0uF  [0402-TIGHT]  89.79,173.61 0 top
C302  10nF  [0402-TIGHT]  90.42,161.29 180 bottom
C303  0.1uF  [0402-TIGHT]  87.88,161.29 0 bottom
C304  0.1uF  [0402-TIGHT]  89.15,163.83 90 bottom
C305  0.1uF  [0402-TIGHT]  90.42,163.83 90 bottom
C306  1.0nF  [0402-TIGHT]  86.61,163.83 90 bottom
C307  0.1uF  [0402-TIGHT]  77.72,175.26 270 top
C308  0.1uF  [0402-TIGHT]  95.25,179.07 90 bottom
C309  0.1uF  [0402-TIGHT]  92.96,164.08 270 bottom
C310  1.0uF  [0402-TIGHT]  92.96,173.99 270 bottom
C311  1.0uF  [0402-TIGHT]  98.04,163.96 180 bottom
C312  1.0uF  [0402-TIGHT]  73.28,162.56 270 bottom
C313  2.2uF  [0402-TIGHT]  82.8,167.64 90 bottom
C314  0.1uF  [0402-TIGHT]  92.2,166.62 270 top
C315  2.2uF  [0402-TIGHT]  92.2,168.66 90 top
D1  3A/10V/280mV  [SOD-323]  14.48,18.29 270 bottom
D2  Yellow  [LED-0603]  18.29,23.37 90 top
D3  3A/10V/280mV  [SOD-323]  30.73,32.26 0 top
D4  Yellow  [LED-0603]  49.28,23.37 90 top
D5  BLUE  [LED-0603]  59.44,23.37 270 top
D6  1A/23V/620mV  [SOD-323]  30.73,30.61 0 top
D7  Yellow  [LED-0603]  54.36,23.37 90 top
D8  GREEN  [LED-0603]  56.9,23.37 270 top
D9  BLUE  [LED-0603]  28.45,23.37 270 top
D10  3A/10V/280mV  [SOD-323]  45.47,18.29 270 bottom
D11  Yellow  [LED-0603]  23.37,23.37 90 top
D12  GREEN  [LED-0603]  25.91,23.37 270 top
D13  3A/10V/280mV  [SOD-323]  61.72,32.26 0 top
D14  1A/23V/620mV  [SOD-323]  61.72,30.61 0 top
D15  Yellow  [LED-0603]  80.26,23.37 90 top
D16  BLUE  [LED-0603]  90.42,23.37 270 top
D17  Yellow  [LED-0603]  85.34,23.37 90 top
D18  GREEN  [LED-0603]  87.88,23.37 270 top
D19  3A/10V/280mV  [SOD-323]  76.45,18.29 270 bottom
D20  3A/10V/280mV  [SOD-323]  92.71,32.26 0 top
D21  1A/23V/620mV  [SOD-323]  92.71,30.61 0 top
D22  Yellow  [LED-0603]  18.29,59.44 90 top
D23  BLUE  [LED-0603]  28.45,59.44 270 top
D24  Yellow  [LED-0603]  23.37,59.44 90 top
D25  GREEN  [LED-0603]  25.91,59.44 270 top
D26  3A/10V/280mV  [SOD-323]  14.48,54.36 270 bottom
D27  3A/10V/280mV  [SOD-323]  30.73,68.33 0 top
D28  1A/23V/620mV  [SOD-323]  30.73,66.67 0 top
D29  Yellow  [LED-0603]  49.28,59.44 90 top
D30  BLUE  [LED-0603]  59.44,59.44 270 top
D31  Yellow  [LED-0603]  54.36,59.44 90 top
D32  GREEN  [LED-0603]  56.9,59.44 270 top
D33  3A/10V/280mV  [SOD-323]  45.47,54.36 270 bottom
D34  3A/10V/280mV  [SOD-323]  61.72,68.33 0 top
D35  1A/23V/620mV  [SOD-323]  61.72,66.67 0 top
D36  Yellow  [LED-0603]  80.26,59.44 90 top
D37  BLUE  [LED-0603]  90.42,59.44 270 top
D38  Yellow  [LED-0603]  85.34,59.44 90 top
D39  GREEN  [LED-0603]  87.88,59.44 270 top
D40  3A/10V/280mV  [SOD-323]  76.45,54.36 270 bottom
D41  3A/10V/280mV  [SOD-323]  92.71,68.33 0 top
D42  1A/23V/620mV  [SOD-323]  92.71,66.67 0 top
D43  Yellow  [LED-0603]  18.29,95.5 90 top
D44  BLUE  [LED-0603]  28.45,95.5 270 top
D45  Yellow  [LED-0603]  23.37,95.5 90 top
D46  GREEN  [LED-0603]  25.91,95.5 270 top
D47  3A/10V/280mV  [SOD-323]  14.48,90.42 270 bottom
D48  3A/10V/280mV  [SOD-323]  30.73,104.39 0 top
D49  1A/23V/620mV  [SOD-323]  30.73,102.74 0 top
D50  Yellow  [LED-0603]  49.28,95.5 90 top
D51  BLUE  [LED-0603]  59.44,95.5 270 top
D52  Yellow  [LED-0603]  54.36,95.5 90 top
D53  GREEN  [LED-0603]  56.9,95.5 270 top
D54  3A/10V/280mV  [SOD-323]  45.47,90.42 270 bottom
D55  3A/10V/280mV  [SOD-323]  61.72,104.39 0 top
D56  1A/23V/620mV  [SOD-323]  61.72,102.74 0 top
D57  Yellow  [LED-0603]  80.26,95.5 90 top
D58  BLUE  [LED-0603]  90.42,95.5 270 top
D59  Yellow  [LED-0603]  85.34,95.5 90 top
D60  GREEN  [LED-0603]  87.88,95.5 270 top
D61  3A/10V/280mV  [SOD-323]  76.45,90.42 270 bottom
D62  3A/10V/280mV  [SOD-323]  92.71,104.39 0 top
D63  1A/23V/620mV  [SOD-323]  92.71,102.74 0 top
D64  Yellow  [LED-0603]  18.29,131.57 90 top
D65  BLUE  [LED-0603]  28.45,131.57 270 top
D66  Yellow  [LED-0603]  23.37,131.57 90 top
D67  GREEN  [LED-0603]  25.91,131.57 270 top
D68  3A/10V/280mV  [SOD-323]  14.48,126.49 270 bottom
D69  3A/10V/280mV  [SOD-323]  30.73,140.46 0 top
D70  1A/23V/620mV  [SOD-323]  30.73,138.81 0 top
D71  Yellow  [LED-0603]  49.28,131.57 90 top
D72  BLUE  [LED-0603]  59.44,131.57 270 top
D73  Yellow  [LED-0603]  54.36,131.57 90 top
D74  GREEN  [LED-0603]  56.9,131.57 270 top
D75  3A/10V/280mV  [SOD-323]  45.47,126.49 270 bottom
D76  3A/10V/280mV  [SOD-323]  61.72,140.46 0 top
D77  1A/23V/620mV  [SOD-323]  61.72,138.81 0 top
D78  Yellow  [LED-0603]  80.26,131.57 90 top
D79  BLUE  [LED-0603]  90.42,131.57 270 top
D80  Yellow  [LED-0603]  85.34,131.57 90 top
D81  GREEN  [LED-0603]  87.88,131.57 270 top
D82  3A/10V/280mV  [SOD-323]  76.45,126.49 270 bottom
D83  3A/10V/280mV  [SOD-323]  92.71,140.46 0 top
D84  1A/23V/620mV  [SOD-323]  92.71,138.81 0 top
D85  Yellow  [LED-0603]  18.29,167.64 90 top
D86  BLUE  [LED-0603]  28.45,167.64 270 top
D87  Yellow  [LED-0603]  23.37,167.64 90 top
D88  GREEN  [LED-0603]  25.91,167.64 270 top
D89  3A/10V/280mV  [SOD-323]  14.48,162.56 270 bottom
D90  3A/10V/280mV  [SOD-323]  30.73,176.53 0 top
D91  1A/23V/620mV  [SOD-323]  30.73,174.88 0 top
D92  Yellow  [LED-0603]  49.28,167.64 90 top
D93  BLUE  [LED-0603]  59.44,167.64 270 top
D94  Yellow  [LED-0603]  54.36,167.64 90 top
D95  GREEN  [LED-0603]  56.9,167.64 270 top
D96  3A/10V/280mV  [SOD-323]  45.47,162.56 270 bottom
D97  3A/10V/280mV  [SOD-323]  61.72,176.53 0 top
D98  1A/23V/620mV  [SOD-323]  61.72,174.88 0 top
D99  Yellow  [LED-0603]  80.26,167.64 90 top
D100  BLUE  [LED-0603]  90.42,167.64 270 top
D101  Yellow  [LED-0603]  85.34,167.64 90 top
D102  GREEN  [LED-0603]  87.88,167.64 270 top
D103  3A/10V/280mV  [SOD-323]  76.45,162.56 270 bottom
D104  3A/10V/280mV  [SOD-323]  92.71,176.53 0 top
D105  1A/23V/620mV  [SOD-323]  92.71,174.88 0 top
E$1  [FIDUCIAL-1X2]  4.23,190.69 0 top
E$2  [FIDUCIAL-1X2]  4.23,190.69 0 bottom
E$3  [FIDUCIAL-1X2]  101.94,190.69 0 top
E$4  [FIDUCIAL-1X2]  101.94,190.69 0 bottom
E$5  [FIDUCIAL-1.5X3]  4.23,23.88 0 top
E$6  [FIDUCIAL-1.5X3]  4.23,23.88 0 bottom
FD1  FIDUCIAL1X2  [FIDUCIAL-1X2]  36.07,17.02 0 top
FD2  FIDUCIAL1X2  [FIDUCIAL-1X2]  11.56,41.4 0 bottom
FD3  FIDUCIAL1X2  [FIDUCIAL-1X2]  11.56,41.4 0 top
FD4  FIDUCIAL1X2  [FIDUCIAL-1X2]  32.89,12.83 0 bottom
FD5  FIDUCIAL1X2  [FIDUCIAL-1X2]  63.88,12.83 0 bottom
FD6  FIDUCIAL1X2  [FIDUCIAL-1X2]  42.54,41.4 0 bottom
FD7  FIDUCIAL1X2  [FIDUCIAL-1X2]  67.06,17.02 0 top
FD8  FIDUCIAL1X2  [FIDUCIAL-1X2]  42.54,41.4 0 top
FD9  FIDUCIAL1X2  [FIDUCIAL-1X2]  94.87,12.83 0 bottom
FD10  FIDUCIAL1X2  [FIDUCIAL-1X2]  73.53,41.4 0 bottom
FD11  FIDUCIAL1X2  [FIDUCIAL-1X2]  98.04,17.02 0 top
FD12  FIDUCIAL1X2  [FIDUCIAL-1X2]  73.53,41.4 0 top
FD13  FIDUCIAL1X2  [FIDUCIAL-1X2]  32.89,48.9 0 bottom
FD14  FIDUCIAL1X2  [FIDUCIAL-1X2]  11.56,77.47 0 bottom
FD15  FIDUCIAL1X2  [FIDUCIAL-1X2]  36.07,53.09 0 top
FD16  FIDUCIAL1X2  [FIDUCIAL-1X2]  11.56,77.47 0 top
FD17  FIDUCIAL1X2  [FIDUCIAL-1X2]  63.88,48.9 0 bottom
FD18  FIDUCIAL1X2  [FIDUCIAL-1X2]  42.54,77.47 0 bottom
FD19  FIDUCIAL1X2  [FIDUCIAL-1X2]  67.06,53.09 0 top
FD20  FIDUCIAL1X2  [FIDUCIAL-1X2]  42.54,77.47 0 top
FD21  FIDUCIAL1X2  [FIDUCIAL-1X2]  94.87,48.9 0 bottom
FD22  FIDUCIAL1X2  [FIDUCIAL-1X2]  73.53,77.47 0 bottom
FD23  FIDUCIAL1X2  [FIDUCIAL-1X2]  98.04,53.09 0 top
FD24  FIDUCIAL1X2  [FIDUCIAL-1X2]  73.53,77.47 0 top
FD25  FIDUCIAL1X2  [FIDUCIAL-1X2]  32.89,84.96 0 bottom
FD26  FIDUCIAL1X2  [FIDUCIAL-1X2]  11.56,113.54 0 bottom
FD27  FIDUCIAL1X2  [FIDUCIAL-1X2]  36.07,89.15 0 top
FD28  FIDUCIAL1X2  [FIDUCIAL-1X2]  11.56,113.54 0 top
FD29  FIDUCIAL1X2  [FIDUCIAL-1X2]  63.88,84.96 0 bottom
FD30  FIDUCIAL1X2  [FIDUCIAL-1X2]  42.54,113.54 0 bottom
FD31  FIDUCIAL1X2  [FIDUCIAL-1X2]  67.06,89.15 0 top
FD32  FIDUCIAL1X2  [FIDUCIAL-1X2]  42.54,113.54 0 top
FD33  FIDUCIAL1X2  [FIDUCIAL-1X2]  94.87,84.96 0 bottom
FD34  FIDUCIAL1X2  [FIDUCIAL-1X2]  73.53,113.54 0 bottom
FD35  FIDUCIAL1X2  [FIDUCIAL-1X2]  98.04,89.15 0 top
FD36  FIDUCIAL1X2  [FIDUCIAL-1X2]  73.53,113.54 0 top
FD37  FIDUCIAL1X2  [FIDUCIAL-1X2]  32.89,121.03 0 bottom
FD38  FIDUCIAL1X2  [FIDUCIAL-1X2]  11.56,149.61 0 bottom
FD39  FIDUCIAL1X2  [FIDUCIAL-1X2]  36.07,125.22 0 top
FD40  FIDUCIAL1X2  [FIDUCIAL-1X2]  11.56,149.61 0 top
FD41  FIDUCIAL1X2  [FIDUCIAL-1X2]  63.88,121.03 0 bottom
FD42  FIDUCIAL1X2  [FIDUCIAL-1X2]  42.54,149.61 0 bottom
FD43  FIDUCIAL1X2  [FIDUCIAL-1X2]  67.06,125.22 0 top
FD44  FIDUCIAL1X2  [FIDUCIAL-1X2]  42.54,149.61 0 top
FD45  FIDUCIAL1X2  [FIDUCIAL-1X2]  94.87,121.03 0 bottom
FD46  FIDUCIAL1X2  [FIDUCIAL-1X2]  73.53,149.61 0 bottom
FD47  FIDUCIAL1X2  [FIDUCIAL-1X2]  98.04,125.22 0 top
FD48  FIDUCIAL1X2  [FIDUCIAL-1X2]  73.53,149.61 0 top
FD49  FIDUCIAL1X2  [FIDUCIAL-1X2]  32.89,157.1 0 bottom
FD50  FIDUCIAL1X2  [FIDUCIAL-1X2]  11.56,185.67 0 bottom
FD51  FIDUCIAL1X2  [FIDUCIAL-1X2]  36.07,161.29 0 top
FD52  FIDUCIAL1X2  [FIDUCIAL-1X2]  11.56,185.67 0 top
FD53  FIDUCIAL1X2  [FIDUCIAL-1X2]  63.88,157.1 0 bottom
FD54  FIDUCIAL1X2  [FIDUCIAL-1X2]  42.54,185.67 0 bottom
FD55  FIDUCIAL1X2  [FIDUCIAL-1X2]  67.06,161.29 0 top
FD56  FIDUCIAL1X2  [FIDUCIAL-1X2]  42.54,185.67 0 top
FD57  FIDUCIAL1X2  [FIDUCIAL-1X2]  94.87,157.1 0 bottom
FD58  FIDUCIAL1X2  [FIDUCIAL-1X2]  73.53,185.67 0 bottom
FD59  FIDUCIAL1X2  [FIDUCIAL-1X2]  98.04,161.29 0 top
FD60  FIDUCIAL1X2  [FIDUCIAL-1X2]  73.53,185.67 0 top
GND  TEST-POINTTP_15TH_THRU  [TP_15TH]  35.43,21.72 0 top
GND1  TEST-POINTTP_15TH_THRU  [TP_15TH]  66.42,21.72 0 top
GND2  TEST-POINTTP_15TH_THRU  [TP_15TH]  97.41,21.72 0 top
GND3  TEST-POINTTP_15TH_THRU  [TP_15TH]  35.43,57.79 0 top
GND4  TEST-POINTTP_15TH_THRU  [TP_15TH]  66.42,57.79 0 top
GND5  TEST-POINTTP_15TH_THRU  [TP_15TH]  97.41,57.79 0 top
GND6  TEST-POINTTP_15TH_THRU  [TP_15TH]  35.43,93.85 0 top
GND7  TEST-POINTTP_15TH_THRU  [TP_15TH]  66.42,93.85 0 top
GND8  TEST-POINTTP_15TH_THRU  [TP_15TH]  97.41,93.85 0 top
GND9  TEST-POINTTP_15TH_THRU  [TP_15TH]  35.43,129.92 0 top
GND10  TEST-POINTTP_15TH_THRU  [TP_15TH]  66.42,129.92 0 top
GND11  TEST-POINTTP_15TH_THRU  [TP_15TH]  97.41,129.92 0 top
GND12  TEST-POINTTP_15TH_THRU  [TP_15TH]  35.43,165.99 0 top
GND13  TEST-POINTTP_15TH_THRU  [TP_15TH]  66.42,165.99 0 top
GND14  TEST-POINTTP_15TH_THRU  [TP_15TH]  97.41,165.99 0 top
H1  STAND-OFF  [STAND-OFF]  9.4,14.48 0 bottom
H2  STAND-OFF  [STAND-OFF]  34.8,14.48 0 bottom
H3  STAND-OFF  [STAND-OFF]  9.4,39.88 0 bottom
H4  STAND-OFF  [STAND-OFF]  34.8,39.88 0 bottom
H5  STAND-OFF  [STAND-OFF]  40.39,14.48 0 bottom
H6  STAND-OFF  [STAND-OFF]  65.79,14.48 0 bottom
H7  STAND-OFF  [STAND-OFF]  65.79,39.88 0 bottom
H8  STAND-OFF  [STAND-OFF]  40.39,39.88 0 bottom
H9  STAND-OFF  [STAND-OFF]  71.37,14.48 0 bottom
H10  STAND-OFF  [STAND-OFF]  96.77,14.48 0 bottom
H11  STAND-OFF  [STAND-OFF]  96.77,39.88 0 bottom
H12  STAND-OFF  [STAND-OFF]  71.37,39.88 0 bottom
H13  STAND-OFF  [STAND-OFF]  9.4,50.55 0 bottom
H14  STAND-OFF  [STAND-OFF]  34.8,50.55 0 bottom
H15  STAND-OFF  [STAND-OFF]  34.8,75.95 0 bottom
H16  STAND-OFF  [STAND-OFF]  9.4,75.95 0 bottom
H17  STAND-OFF  [STAND-OFF]  40.39,50.55 0 bottom
H18  STAND-OFF  [STAND-OFF]  65.79,50.55 0 bottom
H19  STAND-OFF  [STAND-OFF]  65.79,75.95 0 bottom
H20  STAND-OFF  [STAND-OFF]  40.39,75.95 0 bottom
H21  STAND-OFF  [STAND-OFF]  71.37,50.55 0 bottom
H22  STAND-OFF  [STAND-OFF]  96.77,50.55 0 bottom
H23  STAND-OFF  [STAND-OFF]  96.77,75.95 0 bottom
H24  STAND-OFF  [STAND-OFF]  71.37,75.95 0 bottom
H25  STAND-OFF  [STAND-OFF]  9.4,86.61 0 bottom
H26  STAND-OFF  [STAND-OFF]  34.8,86.61 0 bottom
H27  STAND-OFF  [STAND-OFF]  34.8,112.01 0 bottom
H28  STAND-OFF  [STAND-OFF]  9.4,112.01 0 bottom
H29  STAND-OFF  [STAND-OFF]  40.39,86.61 0 bottom
H30  STAND-OFF  [STAND-OFF]  65.79,86.61 0 bottom
H31  STAND-OFF  [STAND-OFF]  65.79,112.01 0 bottom
H32  STAND-OFF  [STAND-OFF]  40.39,112.01 0 bottom
H33  STAND-OFF  [STAND-OFF]  71.37,86.61 0 bottom
H34  STAND-OFF  [STAND-OFF]  96.77,86.61 0 bottom
H35  STAND-OFF  [STAND-OFF]  96.77,112.01 0 bottom
H36  STAND-OFF  [STAND-OFF]  71.37,112.01 0 bottom
H37  STAND-OFF  [STAND-OFF]  9.4,122.68 0 bottom
H38  STAND-OFF  [STAND-OFF]  34.8,122.68 0 bottom
H39  STAND-OFF  [STAND-OFF]  34.8,148.08 0 bottom
H40  STAND-OFF  [STAND-OFF]  9.4,148.08 0 bottom
H41  STAND-OFF  [STAND-OFF]  40.39,122.68 0 bottom
H42  STAND-OFF  [STAND-OFF]  65.79,122.68 0 bottom
H43  STAND-OFF  [STAND-OFF]  65.79,148.08 0 bottom
H44  STAND-OFF  [STAND-OFF]  40.39,148.08 0 bottom
H45  STAND-OFF  [STAND-OFF]  71.37,122.68 0 bottom
H46  STAND-OFF  [STAND-OFF]  96.77,122.68 0 bottom
H47  STAND-OFF  [STAND-OFF]  96.77,148.08 0 bottom
H48  STAND-OFF  [STAND-OFF]  71.37,148.08 0 bottom
H49  STAND-OFF  [STAND-OFF]  9.4,158.75 0 bottom
H50  STAND-OFF  [STAND-OFF]  34.8,158.75 0 bottom
H51  STAND-OFF  [STAND-OFF]  34.8,184.15 0 bottom
H52  STAND-OFF  [STAND-OFF]  9.4,184.15 0 bottom
H53  STAND-OFF  [STAND-OFF]  40.39,158.75 0 bottom
H54  STAND-OFF  [STAND-OFF]  65.79,158.75 0 bottom
H55  STAND-OFF  [STAND-OFF]  65.79,184.15 0 bottom
H56  STAND-OFF  [STAND-OFF]  40.39,184.15 0 bottom
H57  STAND-OFF  [STAND-OFF]  71.37,158.75 0 bottom
H58  STAND-OFF  [STAND-OFF]  96.77,158.75 0 bottom
H59  STAND-OFF  [STAND-OFF]  96.77,184.15 0 bottom
H60  STAND-OFF  [STAND-OFF]  71.37,184.15 0 bottom
J1  [1X02_NO_SILK]  15.75,13.21 180 bottom
J2  [JST-2-SMD]  17.02,15.75 180 top
J3  [1X02_NO_SILK]  11.94,24.64 270 top
J4  [1X06_NO_SILK]  8.13,23.37 90 top
J5  [USB-C-16P_4LAYER-PADS]  27.18,18.29 0 top
J6  MICRO-SD  [MICRO-SD-SOCKET]  15.11,24.64 0 bottom
J7  [1X01_NO_SILK]  13.21,41.15 0 top
J8  CORTEX_JTAG  [2X5-PTH-1.27MM]  44.2,34.16 270 top
J9  [JST04_1MM_RA]  63.25,23.37 90 top
J10  [JST-2-SMD]  48.01,15.75 180 top
J11  [JST04_1MM_RA]  32.26,23.37 90 top
J12  [1X02_NO_SILK]  46.74,13.21 180 bottom
J13  [1X06_NO_SILK]  39.12,23.37 90 top
J14  CORTEX_JTAG  [2X5-PTH-1.27MM]  13.21,34.16 270 top
J15  [USB-C-16P_4LAYER-PADS]  58.17,18.29 0 top
J16  [1X02_NO_SILK]  42.93,24.64 270 top
J17  MICRO-SD  [MICRO-SD-SOCKET]  46.1,24.64 0 bottom
J18  [1X01_NO_SILK]  44.2,41.15 0 top
J19  CORTEX_JTAG  [2X5-PTH-1.27MM]  75.18,34.16 270 top
J20  [JST04_1MM_RA]  94.23,23.37 90 top
J21  [JST-2-SMD]  78.99,15.75 180 top
J22  [1X02_NO_SILK]  77.72,13.21 180 bottom
J23  [1X06_NO_SILK]  70.1,23.37 90 top
J24  [USB-C-16P_4LAYER-PADS]  89.15,18.29 0 top
J25  [1X02_NO_SILK]  73.91,24.64 270 top
J26  MICRO-SD  [MICRO-SD-SOCKET]  77.09,24.64 0 bottom
J27  [1X01_NO_SILK]  75.18,41.15 0 top
J28  CORTEX_JTAG  [2X5-PTH-1.27MM]  13.21,70.23 270 top
J29  [JST04_1MM_RA]  32.26,59.44 90 top
J30  [JST-2-SMD]  17.02,51.82 180 top
J31  [1X02_NO_SILK]  15.75,49.28 180 bottom
J32  [1X06_NO_SILK]  8.13,59.44 90 top
J33  [USB-C-16P_4LAYER-PADS]  27.18,54.36 0 top
J34  [1X02_NO_SILK]  11.94,60.71 270 top
J35  MICRO-SD  [MICRO-SD-SOCKET]  15.11,60.71 0 bottom
J36  [1X01_NO_SILK]  13.21,77.22 0 top
J37  CORTEX_JTAG  [2X5-PTH-1.27MM]  44.2,70.23 270 top
J38  [JST04_1MM_RA]  63.25,59.44 90 top
J39  [JST-2-SMD]  48.01,51.82 180 top
J40  [1X02_NO_SILK]  46.74,49.28 180 bottom
J41  [1X06_NO_SILK]  39.12,59.44 90 top
J42  [USB-C-16P_4LAYER-PADS]  58.17,54.36 0 top
J43  [1X02_NO_SILK]  42.93,60.71 270 top
J44  MICRO-SD  [MICRO-SD-SOCKET]  46.1,60.71 0 bottom
J45  [1X01_NO_SILK]  44.2,77.22 0 top
J46  CORTEX_JTAG  [2X5-PTH-1.27MM]  75.18,70.23 270 top
J47  [JST04_1MM_RA]  94.23,59.44 90 top
J48  [JST-2-SMD]  78.99,51.82 180 top
J49  [1X02_NO_SILK]  77.72,49.28 180 bottom
J50  [1X06_NO_SILK]  70.1,59.44 90 top
J51  [USB-C-16P_4LAYER-PADS]  89.15,54.36 0 top
J52  [1X02_NO_SILK]  73.91,60.71 270 top
J53  MICRO-SD  [MICRO-SD-SOCKET]  77.09,60.71 0 bottom
J54  [1X01_NO_SILK]  75.18,77.22 0 top
J55  CORTEX_JTAG  [2X5-PTH-1.27MM]  13.21,106.3 270 top
J56  [JST04_1MM_RA]  32.26,95.5 90 top
J57  [JST-2-SMD]  17.02,87.88 180 top
J58  [1X02_NO_SILK]  15.75,85.34 180 bottom
J59  [1X06_NO_SILK]  8.13,95.5 90 top
J60  [USB-C-16P_4LAYER-PADS]  27.18,90.42 0 top
J61  [1X02_NO_SILK]  11.94,96.77 270 top
J62  MICRO-SD  [MICRO-SD-SOCKET]  15.11,96.77 0 bottom
J63  [1X01_NO_SILK]  13.21,113.28 0 top
J64  CORTEX_JTAG  [2X5-PTH-1.27MM]  44.2,106.3 270 top
J65  [JST04_1MM_RA]  63.25,95.5 90 top
J66  [JST-2-SMD]  48.01,87.88 180 top
J67  [1X02_NO_SILK]  46.74,85.34 180 bottom
J68  [1X06_NO_SILK]  39.12,95.5 90 top
J69  [USB-C-16P_4LAYER-PADS]  58.17,90.42 0 top
J70  [1X02_NO_SILK]  42.93,96.77 270 top
J71  MICRO-SD  [MICRO-SD-SOCKET]  46.1,96.77 0 bottom
J72  [1X01_NO_SILK]  44.2,113.28 0 top
J73  CORTEX_JTAG  [2X5-PTH-1.27MM]  75.18,106.3 270 top
J74  [JST04_1MM_RA]  94.23,95.5 90 top
J75  [JST-2-SMD]  78.99,87.88 180 top
J76  [1X02_NO_SILK]  77.72,85.34 180 bottom
J77  [1X06_NO_SILK]  70.1,95.5 90 top
J78  [USB-C-16P_4LAYER-PADS]  89.15,90.42 0 top
J79  [1X02_NO_SILK]  73.91,96.77 270 top
J80  MICRO-SD  [MICRO-SD-SOCKET]  77.09,96.77 0 bottom
J81  [1X01_NO_SILK]  75.18,113.28 0 top
J82  CORTEX_JTAG  [2X5-PTH-1.27MM]  13.21,142.37 270 top
J83  [JST04_1MM_RA]  32.26,131.57 90 top
J84  [JST-2-SMD]  17.02,123.95 180 top
J85  [1X02_NO_SILK]  15.75,121.41 180 bottom
J86  [1X06_NO_SILK]  8.13,131.57 90 top
J87  [USB-C-16P_4LAYER-PADS]  27.18,126.49 0 top
J88  [1X02_NO_SILK]  11.94,132.84 270 top
J89  MICRO-SD  [MICRO-SD-SOCKET]  15.11,132.84 0 bottom
J90  [1X01_NO_SILK]  13.21,149.35 0 top
J91  CORTEX_JTAG  [2X5-PTH-1.27MM]  44.2,142.37 270 top
J92  [JST04_1MM_RA]  63.25,131.57 90 top
J93  [JST-2-SMD]  48.01,123.95 180 top
J94  [1X02_NO_SILK]  46.74,121.41 180 bottom
J95  [1X06_NO_SILK]  39.12,131.57 90 top
J96  [USB-C-16P_4LAYER-PADS]  58.17,126.49 0 top
J97  [1X02_NO_SILK]  42.93,132.84 270 top
J98  MICRO-SD  [MICRO-SD-SOCKET]  46.1,132.84 0 bottom
J99  [1X01_NO_SILK]  44.2,149.35 0 top
J100  CORTEX_JTAG  [2X5-PTH-1.27MM]  75.18,142.37 270 top
J101  [JST04_1MM_RA]  94.23,131.57 90 top
J102  [JST-2-SMD]  78.99,123.95 180 top
J103  [1X02_NO_SILK]  77.72,121.41 180 bottom
J104  [1X06_NO_SILK]  70.1,131.57 90 top
J105  [USB-C-16P_4LAYER-PADS]  89.15,126.49 0 top
J106  [1X02_NO_SILK]  73.91,132.84 270 top
J107  MICRO-SD  [MICRO-SD-SOCKET]  77.09,132.84 0 bottom
J108  [1X01_NO_SILK]  75.18,149.35 0 top
J109  CORTEX_JTAG  [2X5-PTH-1.27MM]  13.21,178.44 270 top
J110  [JST04_1MM_RA]  32.26,167.64 90 top
J111  [JST-2-SMD]  17.02,160.02 180 top
J112  [1X02_NO_SILK]  15.75,157.48 180 bottom
J113  [1X06_NO_SILK]  8.13,167.64 90 top
J114  [USB-C-16P_4LAYER-PADS]  27.18,162.56 0 top
J115  [1X02_NO_SILK]  11.94,168.91 270 top
J116  MICRO-SD  [MICRO-SD-SOCKET]  15.11,168.91 0 bottom
J117  [1X01_NO_SILK]  13.21,185.42 0 top
J118  CORTEX_JTAG  [2X5-PTH-1.27MM]  44.2,178.44 270 top
J119  [JST04_1MM_RA]  63.25,167.64 90 top
J120  [JST-2-SMD]  48.01,160.02 180 top
J121  [1X02_NO_SILK]  46.74,157.48 180 bottom
J122  [1X06_NO_SILK]  39.12,167.64 90 top
J123  [USB-C-16P_4LAYER-PADS]  58.17,162.56 0 top
J124  [1X02_NO_SILK]  42.93,168.91 270 top
J125  MICRO-SD  [MICRO-SD-SOCKET]  46.1,168.91 0 bottom
J126  [1X01_NO_SILK]  44.2,185.42 0 top
J127  CORTEX_JTAG  [2X5-PTH-1.27MM]  75.18,178.44 270 top
J128  [JST04_1MM_RA]  94.23,167.64 90 top
J129  [JST-2-SMD]  78.99,160.02 180 top
J130  [1X02_NO_SILK]  77.72,157.48 180 bottom
J131  [1X06_NO_SILK]  70.1,167.64 90 top
J132  [USB-C-16P_4LAYER-PADS]  89.15,162.56 0 top
J133  [1X02_NO_SILK]  73.91,168.91 270 top
J134  MICRO-SD  [MICRO-SD-SOCKET]  77.09,168.91 0 bottom
J135  [1X01_NO_SILK]  75.18,185.42 0 top
JP1  MEAS  [COMBO-JUMPER_2_NC_TRACE]  39.12,19.56 90 top
JP2  MEAS  [COMBO-JUMPER_2_NC_TRACE]  8.13,19.56 90 top
JP3  MEAS  [COMBO-JUMPER_2_NC_TRACE]  70.1,19.56 90 top
JP4  MEAS  [COMBO-JUMPER_2_NC_TRACE]  8.13,55.63 90 top
JP5  MEAS  [COMBO-JUMPER_2_NC_TRACE]  39.12,55.63 90 top
JP6  MEAS  [COMBO-JUMPER_2_NC_TRACE]  70.1,55.63 90 top
JP7  MEAS  [COMBO-JUMPER_2_NC_TRACE]  8.13,91.69 90 top
JP8  MEAS  [COMBO-JUMPER_2_NC_TRACE]  39.12,91.69 90 top
JP9  MEAS  [COMBO-JUMPER_2_NC_TRACE]  70.1,91.69 90 top
JP10  MEAS  [COMBO-JUMPER_2_NC_TRACE]  8.13,127.76 90 top
JP11  MEAS  [COMBO-JUMPER_2_NC_TRACE]  39.12,127.76 90 top
JP12  MEAS  [COMBO-JUMPER_2_NC_TRACE]  70.1,127.76 90 top
JP13  MEAS  [COMBO-JUMPER_2_NC_TRACE]  8.13,163.83 90 top
JP14  MEAS  [COMBO-JUMPER_2_NC_TRACE]  39.12,163.83 90 top
JP15  MEAS  [COMBO-JUMPER_2_NC_TRACE]  70.1,163.83 90 top
LED1  RED  [LED-0603]  20.83,23.37 90 top
LED2  RED  [LED-0603]  51.82,23.37 90 top
LED3  RED  [LED-0603]  82.8,23.37 90 top
LED4  RED  [LED-0603]  20.83,59.44 90 top
LED5  RED  [LED-0603]  51.82,59.44 90 top
LED6  RED  [LED-0603]  82.8,59.44 90 top
LED7  RED  [LED-0603]  20.83,95.5 90 top
LED8  RED  [LED-0603]  51.82,95.5 90 top
LED9  RED  [LED-0603]  82.8,95.5 90 top
LED10  RED  [LED-0603]  20.83,131.57 90 top
LED11  RED  [LED-0603]  51.82,131.57 90 top
LED12  RED  [LED-0603]  82.8,131.57 90 top
LED13  RED  [LED-0603]  20.83,167.64 90 top
LED14  RED  [LED-0603]  51.82,167.64 90 top
LED15  RED  [LED-0603]  82.8,167.64 90 top
LOGO1  SFE_LOGO_NAME.1_INCH  [SFE_LOGO_NAME_.1]  20.57,40.77 0 bottom
LOGO2  OSHW-LOGOS  [OSHW-LOGO-S]  20.57,15.37 0 bottom
LOGO3  OSHW-LOGOS  [OSHW-LOGO-S]  51.56,15.37 0 bottom
LOGO4  SFE_LOGO_FLAME.1_INCH  [SFE_LOGO_FLAME_.1]  34.16,18.29 0 top
LOGO5  SFE_LOGO_FLAME.1_INCH  [SFE_LOGO_FLAME_.1]  13.59,27.94 0 bottom
LOGO6  SFE_LOGO_FLAME.1_INCH  [SFE_LOGO_FLAME_.1]  65.15,18.29 0 top
LOGO7  SFE_LOGO_NAME.1_INCH  [SFE_LOGO_NAME_.1]  51.56,40.77 0 bottom
LOGO8  SFE_LOGO_FLAME.1_INCH  [SFE_LOGO_FLAME_.1]  44.58,27.94 0 bottom
LOGO9  OSHW-LOGOS  [OSHW-LOGO-S]  82.55,15.37 0 bottom
LOGO10  SFE_LOGO_FLAME.1_INCH  [SFE_LOGO_FLAME_.1]  96.14,18.29 0 top
LOGO11  SFE_LOGO_NAME.1_INCH  [SFE_LOGO_NAME_.1]  82.55,40.77 0 bottom
LOGO12  SFE_LOGO_FLAME.1_INCH  [SFE_LOGO_FLAME_.1]  75.56,27.94 0 bottom
LOGO13  OSHW-LOGOS  [OSHW-LOGO-S]  20.57,51.44 0 bottom
LOGO14  SFE_LOGO_FLAME.1_INCH  [SFE_LOGO_FLAME_.1]  34.16,54.36 0 top
LOGO15  SFE_LOGO_NAME.1_INCH  [SFE_LOGO_NAME_.1]  20.57,76.84 0 bottom
LOGO16  SFE_LOGO_FLAME.1_INCH  [SFE_LOGO_FLAME_.1]  13.59,64.01 0 bottom
LOGO17  OSHW-LOGOS  [OSHW-LOGO-S]  51.56,51.44 0 bottom
LOGO18  SFE_LOGO_FLAME.1_INCH  [SFE_LOGO_FLAME_.1]  65.15,54.36 0 top
LOGO19  SFE_LOGO_NAME.1_INCH  [SFE_LOGO_NAME_.1]  51.56,76.84 0 bottom
LOGO20  SFE_LOGO_FLAME.1_INCH  [SFE_LOGO_FLAME_.1]  44.58,64.01 0 bottom
LOGO21  OSHW-LOGOS  [OSHW-LOGO-S]  82.55,51.44 0 bottom
LOGO22  SFE_LOGO_FLAME.1_INCH  [SFE_LOGO_FLAME_.1]  96.14,54.36 0 top
LOGO23  SFE_LOGO_NAME.1_INCH  [SFE_LOGO_NAME_.1]  82.55,76.84 0 bottom
LOGO24  SFE_LOGO_FLAME.1_INCH  [SFE_LOGO_FLAME_.1]  75.56,64.01 0 bottom
LOGO25  OSHW-LOGOS  [OSHW-LOGO-S]  20.57,87.5 0 bottom
LOGO26  SFE_LOGO_FLAME.1_INCH  [SFE_LOGO_FLAME_.1]  34.16,90.42 0 top
LOGO27  SFE_LOGO_NAME.1_INCH  [SFE_LOGO_NAME_.1]  20.57,112.9 0 bottom
LOGO28  SFE_LOGO_FLAME.1_INCH  [SFE_LOGO_FLAME_.1]  13.59,100.08 0 bottom
LOGO29  OSHW-LOGOS  [OSHW-LOGO-S]  51.56,87.5 0 bottom
LOGO30  SFE_LOGO_FLAME.1_INCH  [SFE_LOGO_FLAME_.1]  65.15,90.42 0 top
LOGO31  SFE_LOGO_NAME.1_INCH  [SFE_LOGO_NAME_.1]  51.56,112.9 0 bottom
LOGO32  SFE_LOGO_FLAME.1_INCH  [SFE_LOGO_FLAME_.1]  44.58,100.08 0 bottom
LOGO33  OSHW-LOGOS  [OSHW-LOGO-S]  82.55,87.5 0 bottom
LOGO34  SFE_LOGO_FLAME.1_INCH  [SFE_LOGO_FLAME_.1]  96.14,90.42 0 top
LOGO35  SFE_LOGO_NAME.1_INCH  [SFE_LOGO_NAME_.1]  82.55,112.9 0 bottom
LOGO36  SFE_LOGO_FLAME.1_INCH  [SFE_LOGO_FLAME_.1]  75.56,100.08 0 bottom
LOGO37  OSHW-LOGOS  [OSHW-LOGO-S]  20.57,123.57 0 bottom
LOGO38  SFE_LOGO_FLAME.1_INCH  [SFE_LOGO_FLAME_.1]  34.16,126.49 0 top
LOGO39  SFE_LOGO_NAME.1_INCH  [SFE_LOGO_NAME_.1]  20.57,148.97 0 bottom
LOGO40  SFE_LOGO_FLAME.1_INCH  [SFE_LOGO_FLAME_.1]  13.59,136.14 0 bottom
LOGO41  OSHW-LOGOS  [OSHW-LOGO-S]  51.56,123.57 0 bottom
LOGO42  SFE_LOGO_FLAME.1_INCH  [SFE_LOGO_FLAME_.1]  65.15,126.49 0 top
LOGO43  SFE_LOGO_NAME.1_INCH  [SFE_LOGO_NAME_.1]  51.56,148.97 0 bottom
LOGO44  SFE_LOGO_FLAME.1_INCH  [SFE_LOGO_FLAME_.1]  44.58,136.14 0 bottom
LOGO45  OSHW-LOGOS  [OSHW-LOGO-S]  82.55,123.57 0 bottom
LOGO46  SFE_LOGO_FLAME.1_INCH  [SFE_LOGO_FLAME_.1]  96.14,126.49 0 top
LOGO47  SFE_LOGO_NAME.1_INCH  [SFE_LOGO_NAME_.1]  82.55,148.97 0 bottom
LOGO48  SFE_LOGO_FLAME.1_INCH  [SFE_LOGO_FLAME_.1]  75.56,136.14 0 bottom
LOGO49  OSHW-LOGOS  [OSHW-LOGO-S]  20.57,159.64 0 bottom
LOGO50  SFE_LOGO_FLAME.1_INCH  [SFE_LOGO_FLAME_.1]  34.16,162.56 0 top
LOGO51  SFE_LOGO_NAME.1_INCH  [SFE_LOGO_NAME_.1]  20.57,185.04 0 bottom
LOGO52  SFE_LOGO_FLAME.1_INCH  [SFE_LOGO_FLAME_.1]  13.59,172.21 0 bottom
LOGO53  OSHW-LOGOS  [OSHW-LOGO-S]  51.56,159.64 0 bottom
LOGO54  SFE_LOGO_FLAME.1_INCH  [SFE_LOGO_FLAME_.1]  65.15,162.56 0 top
LOGO55  SFE_LOGO_NAME.1_INCH  [SFE_LOGO_NAME_.1]  51.56,185.04 0 bottom
LOGO56  SFE_LOGO_FLAME.1_INCH  [SFE_LOGO_FLAME_.1]  44.58,172.21 0 bottom
LOGO57  OSHW-LOGOS  [OSHW-LOGO-S]  82.55,159.64 0 bottom
LOGO58  SFE_LOGO_FLAME.1_INCH  [SFE_LOGO_FLAME_.1]  96.14,162.56 0 top
LOGO59  SFE_LOGO_NAME.1_INCH  [SFE_LOGO_NAME_.1]  82.55,185.04 0 bottom
LOGO60  SFE_LOGO_FLAME.1_INCH  [SFE_LOGO_FLAME_.1]  75.56,172.21 0 bottom
Q1  20V/0.2A/8MHz/1.2Ω/1Vth  [SOT-416FL]  33.02,23.75 180 bottom
Q2  20V/4.2A/52mΩ/1.4W  [SOT23-3]  12.45,28.45 0 top
Q3  20V/0.2A/8MHz/1.2Ω/1Vth  [SOT-416FL]  30.99,23.37 180 bottom
Q4  20V/0.2A/8MHz/1.2Ω/1Vth  [SOT-416FL]  64.01,23.75 180 bottom
Q5  20V/0.2A/8MHz/1.2Ω/1Vth  [SOT-416FL]  61.98,23.37 180 bottom
Q6  20V/0.2A/8MHz/1.2Ω/1Vth  [SOT-416FL]  65.79,35.69 0 bottom
Q7  20V/0.2A/8MHz/1.2Ω/1Vth  [SOT-416FL]  34.8,35.69 0 bottom
Q8  20V/0.2A/8MHz/1.2Ω/1Vth  [SOT-416FL]  66.67,24.38 90 bottom
Q9  20V/0.2A/8MHz/1.2Ω/1Vth  [SOT-416FL]  35.69,24.38 90 bottom
Q10  20V/0.2A/8MHz/1.2Ω/1Vth  [SOT-416FL]  31.75,34.8 180 bottom
Q11  20V/0.2A/8MHz/1.2Ω/1Vth  [SOT-416FL]  62.74,34.8 180 bottom
Q12  20V/4.2A/52mΩ/1.4W  [SOT23-3]  43.43,28.45 0 top
Q13  20V/0.2A/8MHz/1.2Ω/1Vth  [SOT-416FL]  95,23.75 180 bottom
Q14  20V/0.2A/8MHz/1.2Ω/1Vth  [SOT-416FL]  92.96,23.37 180 bottom
Q15  20V/0.2A/8MHz/1.2Ω/1Vth  [SOT-416FL]  96.77,35.69 0 bottom
Q16  20V/0.2A/8MHz/1.2Ω/1Vth  [SOT-416FL]  97.66,24.38 90 bottom
Q17  20V/0.2A/8MHz/1.2Ω/1Vth  [SOT-416FL]  93.73,34.8 180 bottom
Q18  20V/4.2A/52mΩ/1.4W  [SOT23-3]  74.42,28.45 0 top
Q19  20V/0.2A/8MHz/1.2Ω/1Vth  [SOT-416FL]  33.02,59.82 180 bottom
Q20  20V/0.2A/8MHz/1.2Ω/1Vth  [SOT-416FL]  30.99,59.44 180 bottom
Q21  20V/0.2A/8MHz/1.2Ω/1Vth  [SOT-416FL]  34.8,71.75 0 bottom
Q22  20V/0.2A/8MHz/1.2Ω/1Vth  [SOT-416FL]  35.69,60.45 90 bottom
Q23  20V/0.2A/8MHz/1.2Ω/1Vth  [SOT-416FL]  31.75,70.87 180 bottom
Q24  20V/4.2A/52mΩ/1.4W  [SOT23-3]  12.45,64.52 0 top
Q25  20V/0.2A/8MHz/1.2Ω/1Vth  [SOT-416FL]  64.01,59.82 180 bottom
Q26  20V/0.2A/8MHz/1.2Ω/1Vth  [SOT-416FL]  61.98,59.44 180 bottom
Q27  20V/0.2A/8MHz/1.2Ω/1Vth  [SOT-416FL]  65.79,71.75 0 bottom
Q28  20V/0.2A/8MHz/1.2Ω/1Vth  [SOT-416FL]  66.67,60.45 90 bottom
Q29  20V/0.2A/8MHz/1.2Ω/1Vth  [SOT-416FL]  62.74,70.87 180 bottom
Q30  20V/4.2A/52mΩ/1.4W  [SOT23-3]  43.43,64.52 0 top
Q31  20V/0.2A/8MHz/1.2Ω/1Vth  [SOT-416FL]  95,59.82 180 bottom
Q32  20V/0.2A/8MHz/1.2Ω/1Vth  [SOT-416FL]  92.96,59.44 180 bottom
Q33  20V/0.2A/8MHz/1.2Ω/1Vth  [SOT-416FL]  96.77,71.75 0 bottom
Q34  20V/0.2A/8MHz/1.2Ω/1Vth  [SOT-416FL]  97.66,60.45 90 bottom
Q35  20V/0.2A/8MHz/1.2Ω/1Vth  [SOT-416FL]  93.73,70.87 180 bottom
Q36  20V/4.2A/52mΩ/1.4W  [SOT23-3]  74.42,64.52 0 top
Q37  20V/0.2A/8MHz/1.2Ω/1Vth  [SOT-416FL]  33.02,95.89 180 bottom
Q38  20V/0.2A/8MHz/1.2Ω/1Vth  [SOT-416FL]  30.99,95.5 180 bottom
Q39  20V/0.2A/8MHz/1.2Ω/1Vth  [SOT-416FL]  34.8,107.82 0 bottom
Q40  20V/0.2A/8MHz/1.2Ω/1Vth  [SOT-416FL]  35.69,96.52 90 bottom
Q41  20V/0.2A/8MHz/1.2Ω/1Vth  [SOT-416FL]  31.75,106.93 180 bottom
Q42  20V/4.2A/52mΩ/1.4W  [SOT23-3]  12.45,100.58 0 top
Q43  20V/0.2A/8MHz/1.2Ω/1Vth  [SOT-416FL]  64.01,95.89 180 bottom
Q44  20V/0.2A/8MHz/1.2Ω/1Vth  [SOT-416FL]  61.98,95.5 180 bottom
Q45  20V/0.2A/8MHz/1.2Ω/1Vth  [SOT-416FL]  65.79,107.82 0 bottom
Q46  20V/0.2A/8MHz/1.2Ω/1Vth  [SOT-416FL]  66.67,96.52 90 bottom
Q47  20V/0.2A/8MHz/1.2Ω/1Vth  [SOT-416FL]  62.74,106.93 180 bottom
Q48  20V/4.2A/52mΩ/1.4W  [SOT23-3]  43.43,100.58 0 top
Q49  20V/0.2A/8MHz/1.2Ω/1Vth  [SOT-416FL]  95,95.89 180 bottom
Q50  20V/0.2A/8MHz/1.2Ω/1Vth  [SOT-416FL]  92.96,95.5 180 bottom
Q51  20V/0.2A/8MHz/1.2Ω/1Vth  [SOT-416FL]  96.77,107.82 0 bottom
Q52  20V/0.2A/8MHz/1.2Ω/1Vth  [SOT-416FL]  97.66,96.52 90 bottom
Q53  20V/0.2A/8MHz/1.2Ω/1Vth  [SOT-416FL]  93.73,106.93 180 bottom
Q54  20V/4.2A/52mΩ/1.4W  [SOT23-3]  74.42,100.58 0 top
Q55  20V/0.2A/8MHz/1.2Ω/1Vth  [SOT-416FL]  33.02,131.95 180 bottom
Q56  20V/0.2A/8MHz/1.2Ω/1Vth  [SOT-416FL]  30.99,131.57 180 bottom
Q57  20V/0.2A/8MHz/1.2Ω/1Vth  [SOT-416FL]  34.8,143.89 0 bottom
Q58  20V/0.2A/8MHz/1.2Ω/1Vth  [SOT-416FL]  35.69,132.59 90 bottom
Q59  20V/0.2A/8MHz/1.2Ω/1Vth  [SOT-416FL]  31.75,143 180 bottom
Q60  20V/4.2A/52mΩ/1.4W  [SOT23-3]  12.45,136.65 0 top
Q61  20V/0.2A/8MHz/1.2Ω/1Vth  [SOT-416FL]  64.01,131.95 180 bottom
Q62  20V/0.2A/8MHz/1.2Ω/1Vth  [SOT-416FL]  61.98,131.57 180 bottom
Q63  20V/0.2A/8MHz/1.2Ω/1Vth  [SOT-416FL]  65.79,143.89 0 bottom
Q64  20V/0.2A/8MHz/1.2Ω/1Vth  [SOT-416FL]  66.67,132.59 90 bottom
Q65  20V/0.2A/8MHz/1.2Ω/1Vth  [SOT-416FL]  62.74,143 180 bottom
Q66  20V/4.2A/52mΩ/1.4W  [SOT23-3]  43.43,136.65 0 top
Q67  20V/0.2A/8MHz/1.2Ω/1Vth  [SOT-416FL]  95,131.95 180 bottom
Q68  20V/0.2A/8MHz/1.2Ω/1Vth  [SOT-416FL]  92.96,131.57 180 bottom
Q69  20V/0.2A/8MHz/1.2Ω/1Vth  [SOT-416FL]  96.77,143.89 0 bottom
Q70  20V/0.2A/8MHz/1.2Ω/1Vth  [SOT-416FL]  97.66,132.59 90 bottom
Q71  20V/0.2A/8MHz/1.2Ω/1Vth  [SOT-416FL]  93.73,143 180 bottom
Q72  20V/4.2A/52mΩ/1.4W  [SOT23-3]  74.42,136.65 0 top
Q73  20V/0.2A/8MHz/1.2Ω/1Vth  [SOT-416FL]  33.02,168.02 180 bottom
Q74  20V/0.2A/8MHz/1.2Ω/1Vth  [SOT-416FL]  30.99,167.64 180 bottom
Q75  20V/0.2A/8MHz/1.2Ω/1Vth  [SOT-416FL]  34.8,179.96 0 bottom
Q76  20V/0.2A/8MHz/1.2Ω/1Vth  [SOT-416FL]  35.69,168.66 90 bottom
Q77  20V/0.2A/8MHz/1.2Ω/1Vth  [SOT-416FL]  31.75,179.07 180 bottom
Q78  20V/4.2A/52mΩ/1.4W  [SOT23-3]  12.45,172.72 0 top
Q79  20V/0.2A/8MHz/1.2Ω/1Vth  [SOT-416FL]  64.01,168.02 180 bottom
Q80  20V/0.2A/8MHz/1.2Ω/1Vth  [SOT-416FL]  61.98,167.64 180 bottom
Q81  20V/0.2A/8MHz/1.2Ω/1Vth  [SOT-416FL]  65.79,179.96 0 bottom
Q82  20V/0.2A/8MHz/1.2Ω/1Vth  [SOT-416FL]  66.67,168.66 90 bottom